# Altium PCB H3-core.PcbDoc (part 1 of 2)
Units mil, origin at the board's own origin, x right, y up, seen from the top; angles counter-clockwise.
Board outline 1574.8 x 1968.5 mil, 4 copper layers (Top Layer, GND, POWER, Bottom Layer), stack 23.756 mil thick; 157 components, 231 nets, 971 pads, 256 vias.
Unrouted connection lines stored in the file: 149.
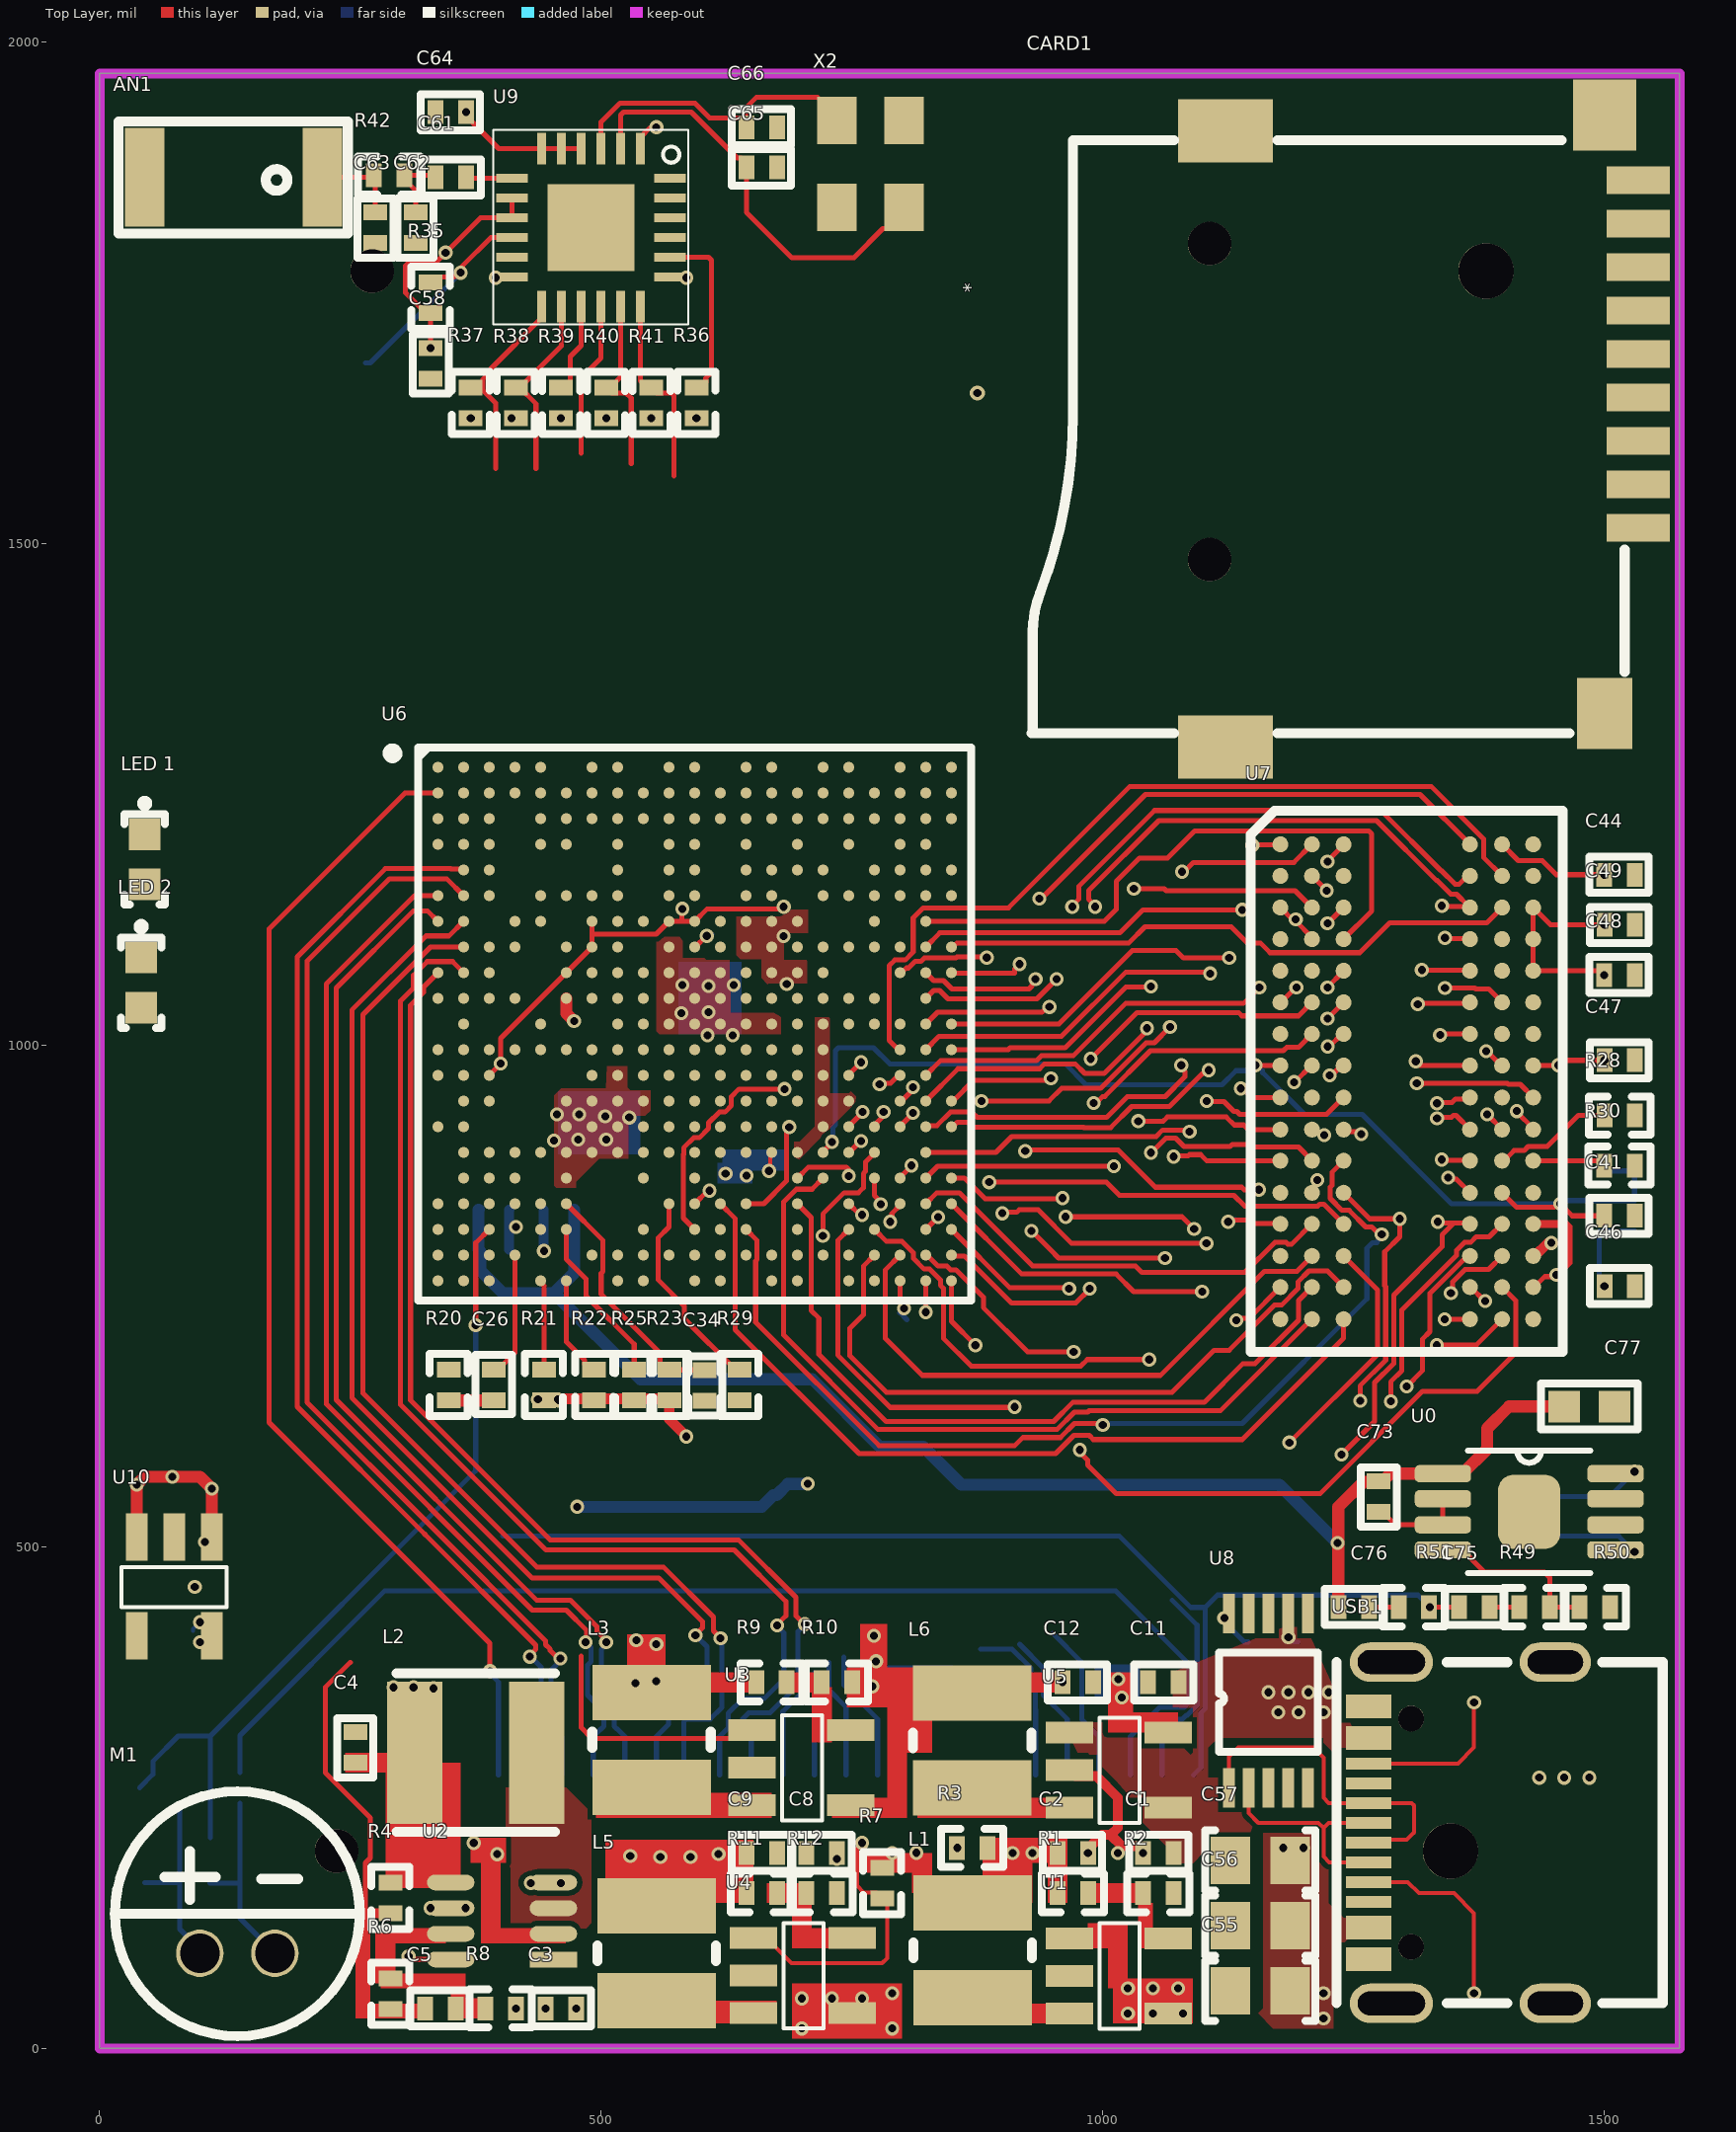
[diagram p0: Top Layer view]
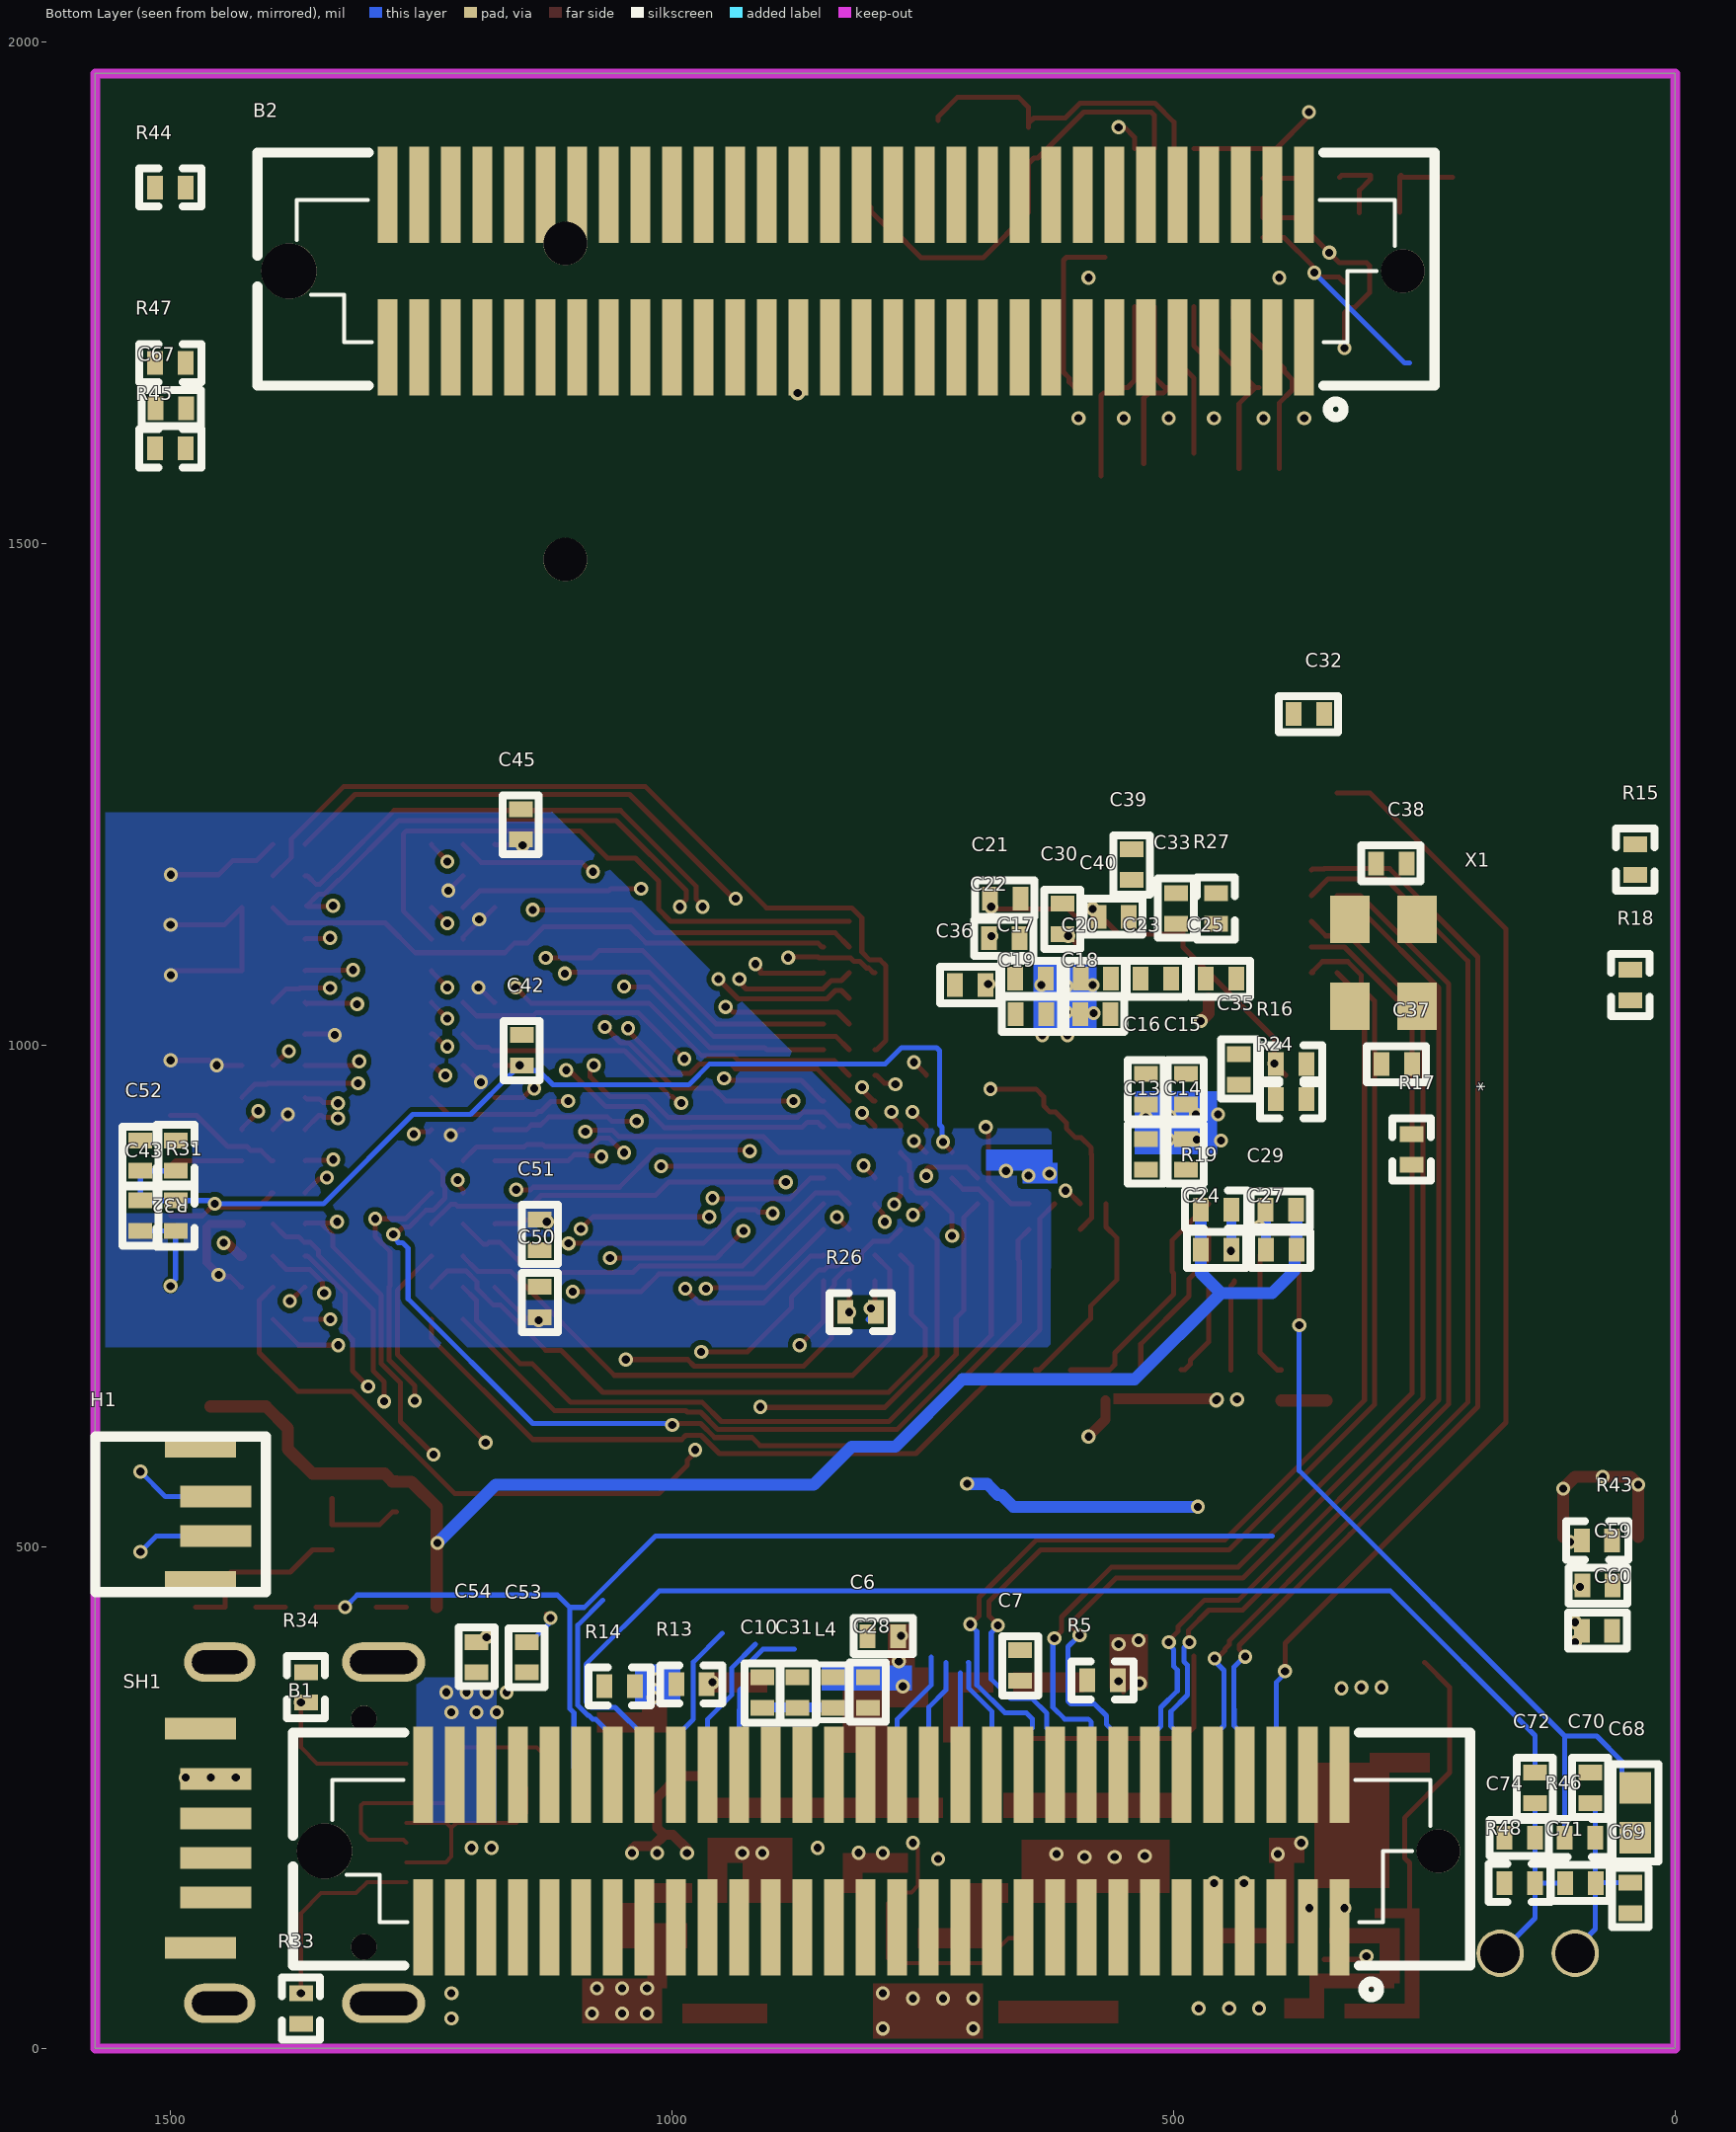
[diagram p1: Bottom Layer view, seen from below]
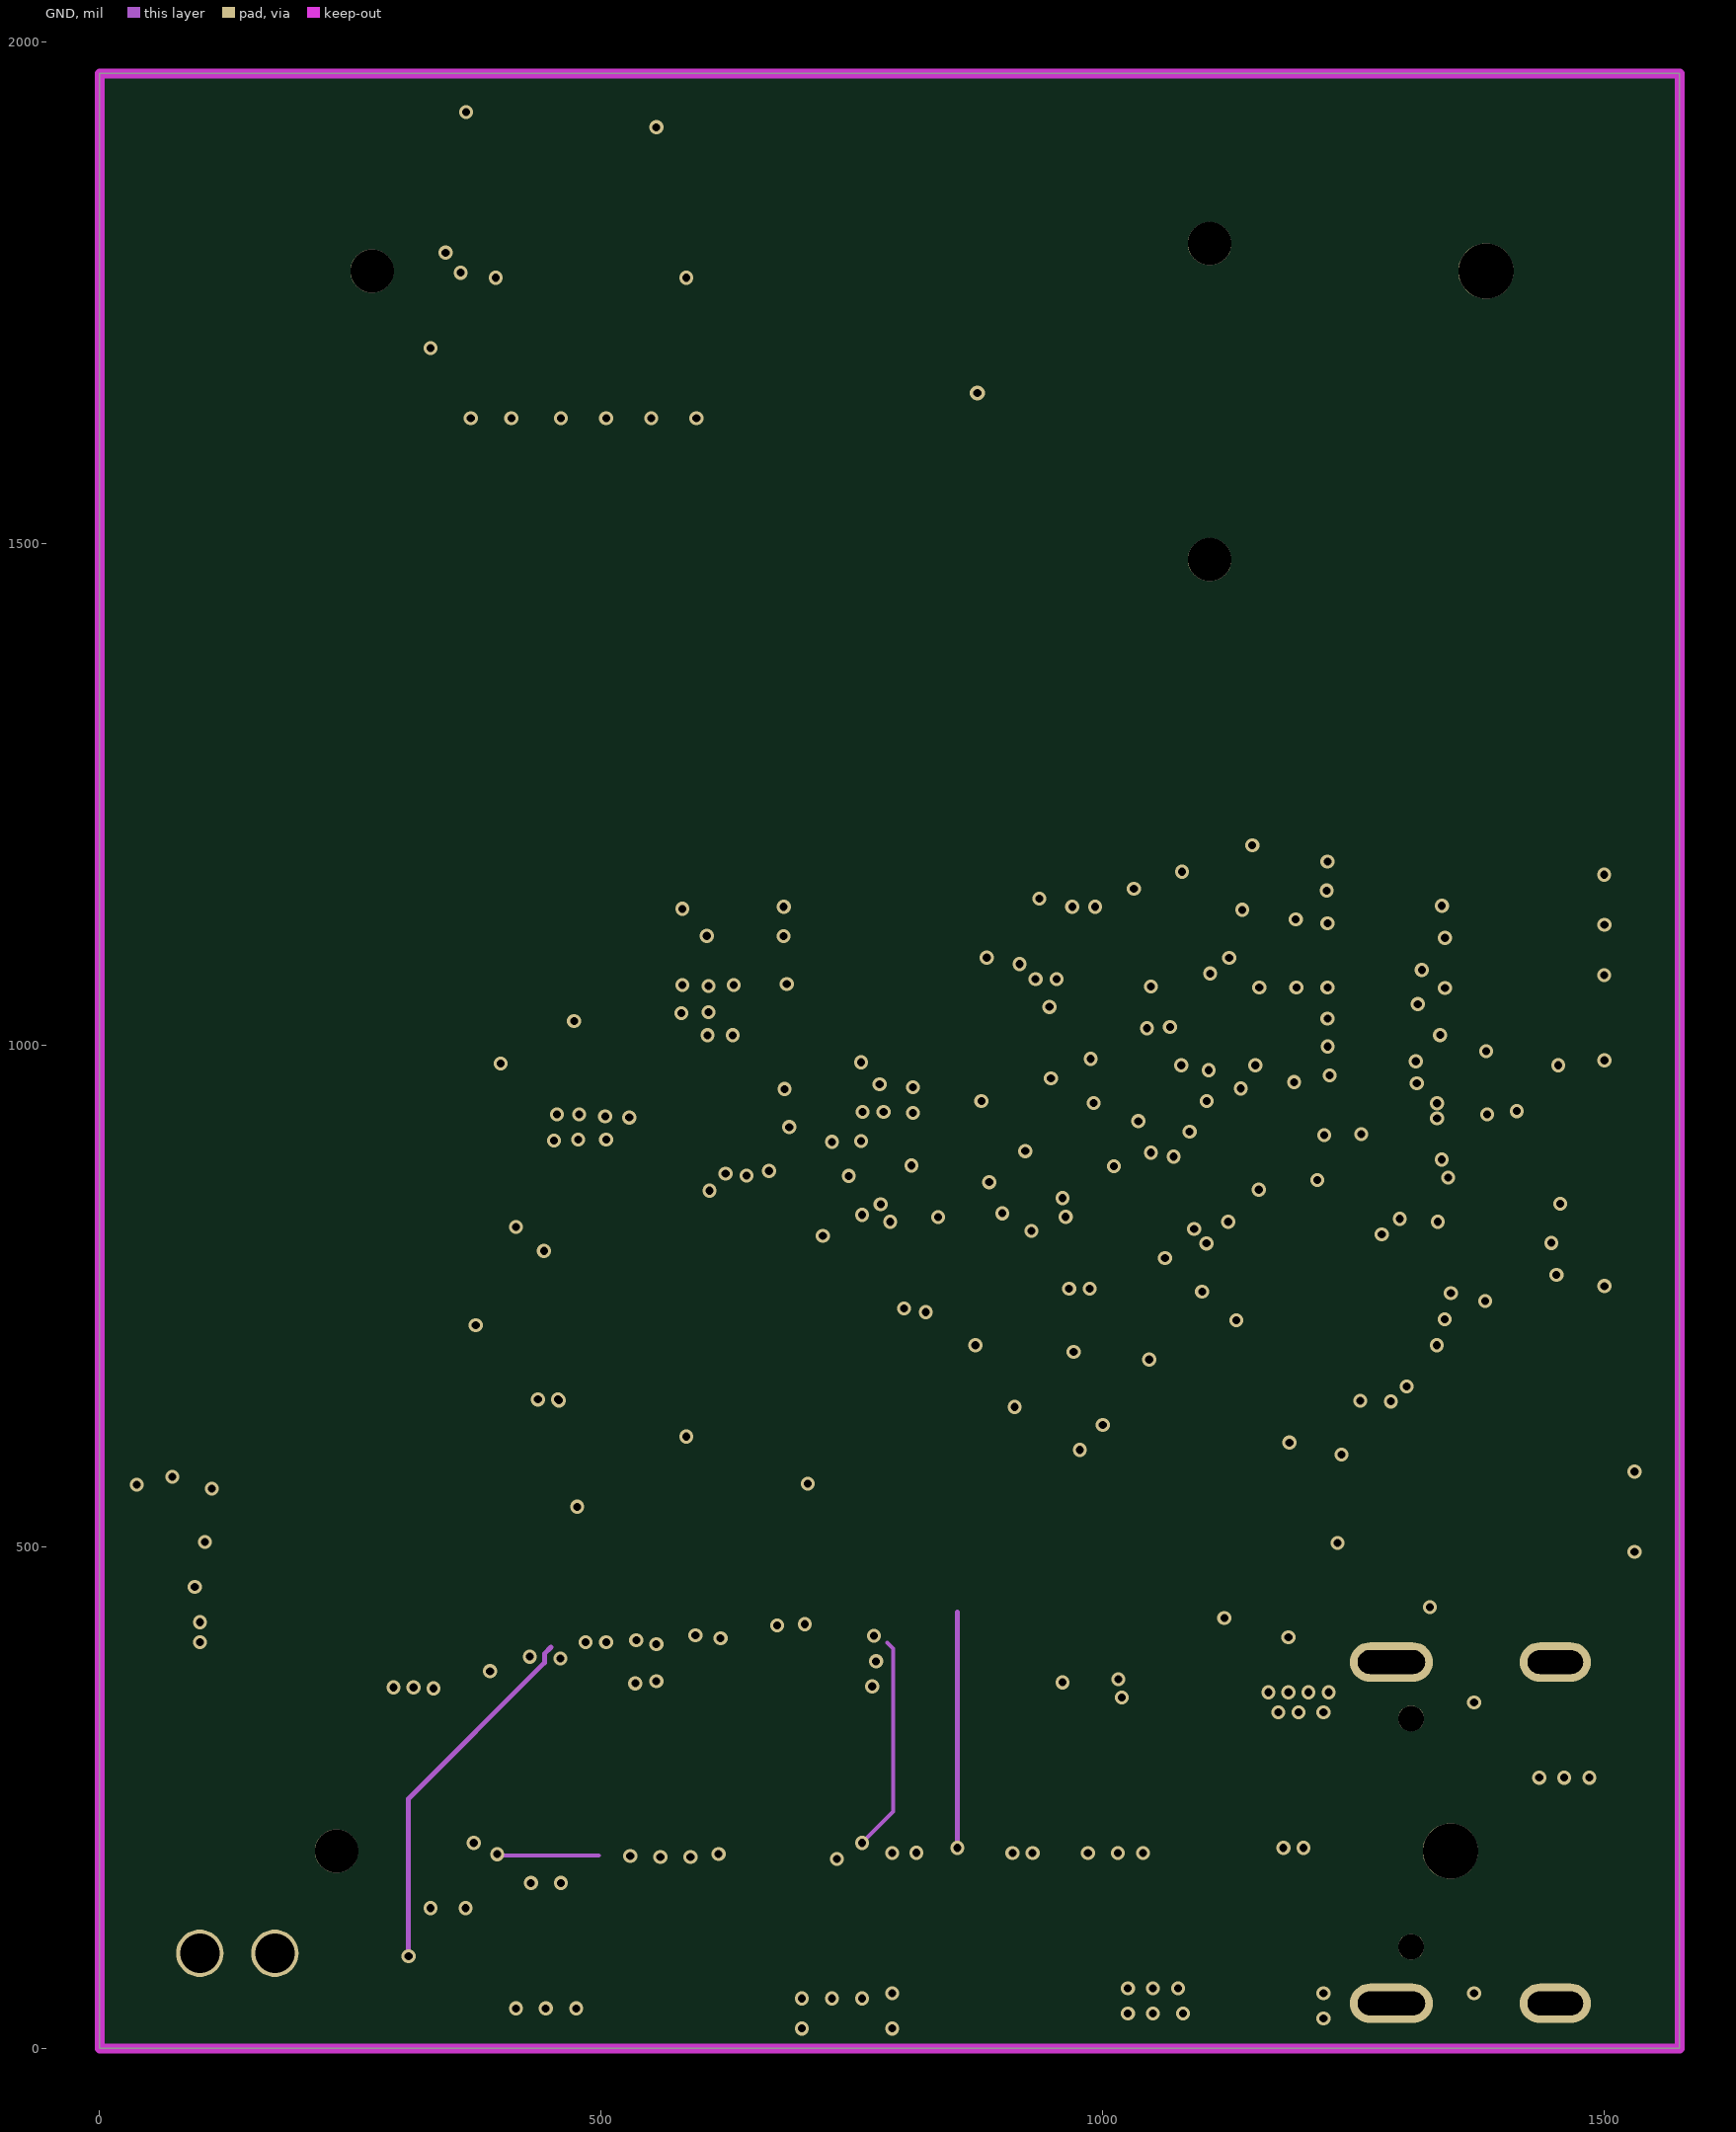
[diagram p2: GND]
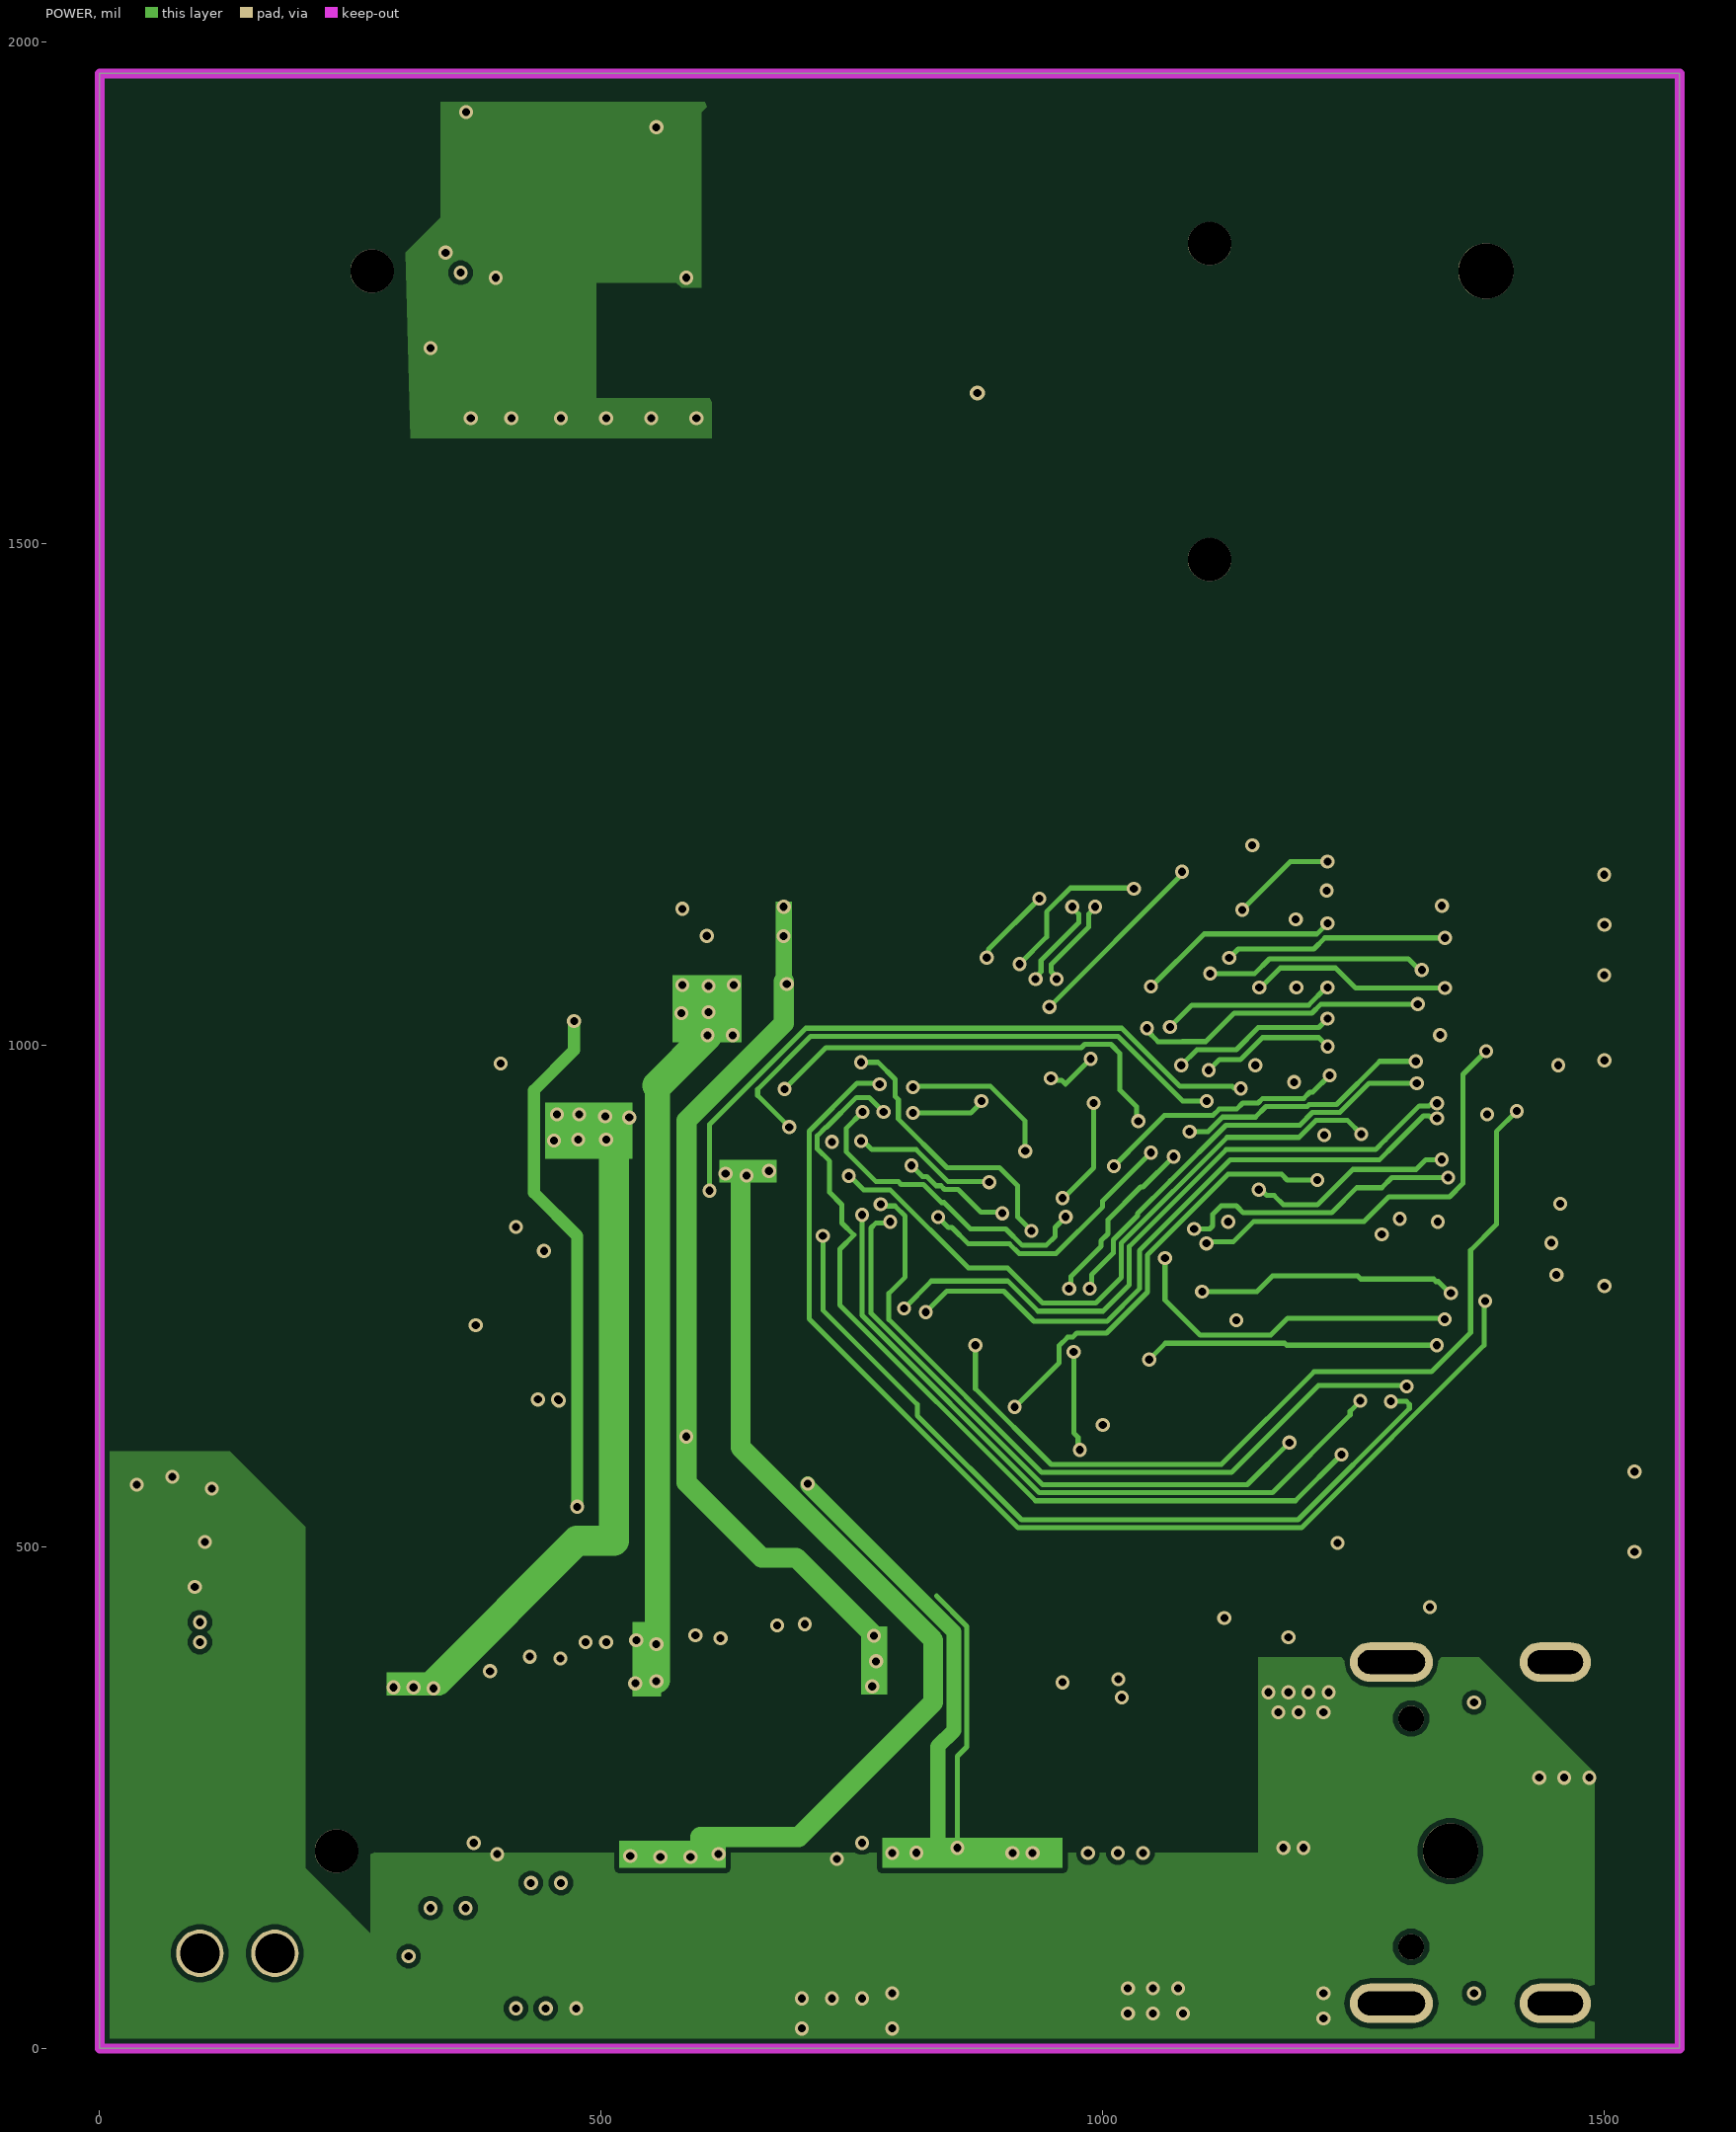
[diagram p3: POWER]

## Layer stack, top to bottom
Top Solder: solder mask 0.4, Solder Resist, Dk 3.5
Top Layer: signal copper 1.378
Dielectric 2: prepreg 2.8, PP-006, Dk 4.1
GND: signal copper 1.4
Dielectric 1: dielectric 12.6, FR-4, Dk 4.8
POWER: signal copper 1.4
Dielectric 3: prepreg 2.8, PP-006, Dk 4.1
Bottom Layer: signal copper 1.378
Bottom Solder: solder mask 0.4, Solder Resist, Dk 3.5

## Board outline
1575,0 0.2,0 0.2,1968.5 1575,1968.5

## Design rules (kind name [scope] priority, off if disabled: settings)
Clearance [All] p1: gap=5 ignorepadtopadclearanceinfootprint=FALSE except(0: Arc-Hole Track-Hole SMDPad-Hole THPad-Hole Via-Hole Fill-Hole Poly-Hole Region-Hole Text-Hole; 3: Arc-Arc Arc-Track Arc-SMDPad Arc-THPad Track-Track Track-SMDPad Track-THPad SMDPad-SMDPad SMDPad-THPad THPad-THPad)
DiffPairsRouting [All] p1: maxlimit=10 minlimit=5 mostfreqgap=5 toplayer_minwidth=5 toplayer_maxwidth=5 toplayer_prefwidth=5 midlayer1_minwidth=5 midlayer1_maxwidth=5 midlayer1_prefwidth=5 midlayer2_minwidth=5 midlayer2_maxwidth=5 midlayer2_prefwidth=5 bottomlayer_minwidth=5 bottomlayer_maxwidth=5 bottomlayer_prefwidth=5 maxuncoupledlength=500
HoleSize [All] p1: absolutevalues=TRUE maxlimit=1181.1 minlimit=1 maxpercent=80.000 minpercent=20.000
HoleToHoleClearance [All] p1: gap=6 allowstackedmicrovias=TRUE
MinimumSolderMaskSliver [All] p1: minsoldermaskwidth=1
PlaneConnect [All] p1: planeconnectstyle=Direct reliefexpansion=20 reliefentries=4 reliefconductorwidth=10 reliefairgap=10
PolygonConnect [All] p1: connectstyle=Direct reliefconductorwidth=10 reliefentries=4 polygonreliefangle="90 Angle" airgapwidth=10
RoomDefinition 4-Connect [InComponentClass('4-Connect')] p1: confinementstyle=ConfineIn formatcopy=TRUE lockcomponents=FALSE outline -5950,-4760 -3950,-4760 -3950,-3760 -5950,-3760
RoomDefinition 3-Wifi-SD [InComponentClass('3-Wifi-SD')] p2: confinementstyle=ConfineIn formatcopy=TRUE lockcomponents=FALSE outline -5950,-4760 -3950,-4760 -3950,-3760 -5950,-3760
RoomDefinition 2-core [InComponentClass('2-core')] p3: confinementstyle=ConfineIn formatcopy=TRUE lockcomponents=FALSE outline -5950,-4760 -3950,-4760 -3950,-3760 -5950,-3760
RoomDefinition 1-Power [InComponentClass('1-Power')] p4: confinementstyle=ConfineIn formatcopy=TRUE lockcomponents=FALSE outline -5950,-4760 -3950,-4760 -3950,-3760 -5950,-3760
RoutingVias [All] p1: holewidth=28 width=50 viastyle="Through Hole" minholewidth=11.81 minwidth=19.68 maxholewidth=1181.1 maxwidth=1181.1
SilkToSilkClearance [All] p1: silktosilkclearance=0
SilkToSolderMaskClearance [IsPad] p1: minsilkscreentomaskgap=0 clearancetoexposedcopper=TRUE
SolderMaskExpansion [All] p1: expansion=4 istentingtop=FALSE
Width [All] p1: maxlimit=39.37 minlimit=4 preferedwidth=4
23 further rules are at their usual default settings.

## Classes and differential pairs
component class 4-Connect: B1 B2 C53 C54 C55 C56 C57 R33 R34 SH1 U8 USB1
component class 3-Wifi-SD: AN1 C58 C59 C60 C61 C62 C63 C64 C65 C66 C67 C68 C69 C70 C71 C72 C73 C74 C75 C76 C77 CARD1 H1 M1 R35 R36 R37 R38 R39 R40 R41 R42 R43 R44 R45 R46 R47 R48 R49 R50 R51 U0 U9 U10 X2
component class 1-Power: C1 C2 C3 C4 C5 C6 C7 C8 C9 C10 C11 C12 L1 L2 L3 L4 L5 L6 R1 R2 R3 R4 R5 R6 R7 R8 R9 R10 R11 R12 R13 R14 U1 U2 U3 U4 U5
component class 2-core: C13 C14 C15 C16 C17 C18 C19 C20 C21 C22 C23 C24 C25 C26 C27 C28 C29 C30 C31 C32 C33 C34 C35 C36 C37 C38 C39 C40 C41 C42 C43 C44 C45 C46 C47 C48 C49 C50 C51 C52 "LED 1" "LED 2" R15 R16 R17 R18 R19 R20 R21 R22 R23 R24 R25 R26 R27 R28 R29 R30 R31 R32 U6 U7 X1
differential pair HTXC: +HTXC_P -HTXC_N
differential pair HTX2: +HTX2_P -HTX2_N
differential pair HTX1: +HTX1_P -HTX1_N
differential pair HTX0: +HTX0_P -HTX0_N
differential pair SDQS1: +SDQS1_P -SDQS1_N
differential pair SDQS0: +SDQS0_P -SDQS0_N
differential pair SCK: +SCK_P -SCK_N

## Components (designator, comment, footprint, x,y, rotation, side; value= is the part's Value field where it differs from the comment)
AN1 "AN9520-245" AN-5120 222.17,1865 r180 top
B1 "BTB0.8-60" BTB0.8-60-SMD 791.34,196.85 r0 bottom locked
B2 "BTB0.8-60" BTB0.8-60-SMD 826.77,1771.65 r0 bottom locked
C1 "10uF" CC1005-0402 1055.24,195 r0 top
C2 "10uF" CC1005-0402 970,195 r180 top
C3 "10uF" CC1005-0402 460,40 r0 top
C4 "10uF" CC1005-0402 255,300 r270 top
C5 "10uF" CC1005-0402 339.76,40 r180 top
C6 "10uF" CC1005-0402 790,411 r180 bottom
C7 "10uF" CC1005-0402 653,382 r270 bottom
C8 "10uF" CC1005-0402 719.76,195 r0 top
C9 "10uF" CC1005-0402 660,195 r180 top
C10 "10uF" CC1005-0402 910,355 r270 bottom
C11 "10uF" CC1005-0402 1060.24,365 r0 top
C12 "10uF" CC1005-0402 975,365 r180 top
C13 "10uF" CC1005-0402 527.95,891.19 r90 bottom
C14 "1uF" CC1005-0402 487.95,891.43 r90 bottom
C15 "100nF" CC1005-0402 487.95,956.19 r270 bottom
C16 "100nF" CC1005-0402 527.95,956.19 r270 bottom
C17 "10uF" CC1005-0402 642.95,1066.19 r180 bottom
C18 "1uF" CC1005-0402 578.19,1031.19 r0 bottom
C19 "100nF" CC1005-0402 642.48,1031.19 r180 bottom
C20 "100nF" CC1005-0402 577.71,1066.19 r0 bottom
C21 "1uF" CC1005-0402 667.95,1146.19 r0 bottom
C22 "100nF" CC1005-0402 669,1107 r0 bottom
C23 "1uF" CC1005-0402 517.95,1066.19 r180 bottom
C24 "4.7uF" CC1005-0402 457.95,796.19 r180 bottom
C25 "100nF" CC1005-0402 452.95,1066.19 r0 bottom
C26 "1uF" CC1005-0402 392.95,661.19 r90 top
C27 "100nF" CC1005-0402 392.95,796.19 r0 bottom
C28 "100nF" CC1005-0402 805,355 r90 bottom
C29 "10uF" CC1005-0402 393.19,836.19 r0 bottom
C30 "4.7uF" CC1005-0402 611,1126 r270 bottom
C31 "100nF" CC1005-0402 875,355 r270 bottom
C32 "100nF" CC1005-0402 365.24,1330 r0 bottom
C33 "100nF" CC1005-0402 497.95,1136.43 r90 bottom
C34 "100nF" CC1005-0402 602.95,660.95 r270 top
C35 "4.7uF" CC1005-0402 435,976 r90 bottom
C36 "100nF" CC1005-0402 703,1060 r0 bottom
C37 "18PF" CC1005-0402 277.71,981.19 r0 bottom
C38 "18PF" CC1005-0402 282.95,1181.19 r0 bottom
C39 "100nF" CC1005-0402 542,1180 r270 bottom
C40 "100nF" CC1005-0402 560,1128 r0 bottom
C41 "100nF" CC1005-0402 1515,830 r180 top
C42 "100nF" CC1005-0402 1150,995.24 r270 bottom
C43 "100nF" CC1005-0402 1530,830 r270 bottom
C44 "100nF" CC1005-0402 1515,1170 r180 top
C45 "100nF" CC1005-0402 1151,1220.24 r270 bottom
C46 "100nF" CC1005-0402 1515.24,760 r180 top
C47 "100nF" CC1005-0402 1515.24,985 r180 top
C48 "100nF" CC1005-0402 1515,1070 r180 top
C49 "100nF" CC1005-0402 1515.24,1120 r180 top
C50 "100nF" CC1005-0402 1132,744 r270 bottom
C51 "100nF" CC1005-0402 1132,811 r90 bottom
C52 "100nF" CC1005-0402 1530,890 r270 bottom
C53 "100nF" CC1005-0402 1145,390 r270 bottom
C54 "100nF" CC1005-0402 1195,390 r90 bottom
C55 "20uF" CC2012-0805 1156.97,57.36 r0 top
C56 "1uF" CC2012-0805 1156.97,122.36 r0 top
C57 "100NF" CC2012-0805 1156.97,187.36 r0 top
C58 "1UF" CC1005-0402 330,1679.76 r270 top
C59 "1UF" CC1005-0402 77.71,461.42 r180 bottom
C60 "1UF" CC1005-0402 78.19,416.42 r180 bottom
C61 "10pF" CC1005-0402 350,1865 r0 top
C62 "10pF" CC1005-0402 315,1814.76 r270 top
C63 "10pF" CC1005-0402 275,1815 r270 top
C64 "1UF" CC1005-0402 350.24,1930 r180 top
C65 "22PF" CC1005-0402 660,1875 r180 top
C66 "22PF" CC1005-0402 660,1915 r180 top
C67 "1UF" CC1005-0402 1499.76,1635 r180 bottom
C68 "10uF" CC1608-0603 40,235 r90 bottom
C69 "33pF" CC1005-0402 45,150 r90 bottom
C70 "100nf" CC1005-0402 85,259.76 r90 bottom
C71 "100pF" CC1005-0402 94.76,165 r0 bottom
C72 "100nf" CC1005-0402 140,260 r90 bottom
C73 "1uF" CC1005-0402 1275,550 r270 top
C74 "33pF" CC1005-0402 155.24,210 r0 bottom
C75 "330nF" CC1005-0402 1370.24,440 r0 top
C76 "100nf" CC1005-0402 1250,440 r0 top
C77 "10uF" CC1608-0603 1485,640 r0 top
CARD1 "TF-15×15" TF-SMD_TF-15-15 1328,1612 r180 top locked
H1 "SH1.0-2P" SH1.0-2P 1455,550 r270 bottom locked
L1 "2.2uH" Inductor-3010 870.24,97.76 r90 top
L2 "2.2uH" Inductor-4018 375,295 r180 top
L3 "2.2uH" Inductor-3010 550.24,307.76 r90 top
L4 "1500R" Inductor-0402 840,355 r90 bottom
L5 "2.2uH" Inductor-3010 555.24,95 r90 top
L6 "2.2uH" Inductor-3010 870,307.24 r90 top
"LED 1" "LED 0603" "LED 0603" 45,1185.24 r90 top
"LED 2" "LED 0603" "LED 0603" 41.5,1062.41 r90 top
M1 "MIC" MIC6*2.2mm 100,95 r0 top locked
R1 "10KR" CR1005-0402 970,155 r180 top
R2 "10KR" CR1005-0402 1055.24,155 r180 top
R3 "10KR" CR1005-0402 870,200 r0 top
R4 "0R" CR1005-0402 290,150 r90 top
R5 "2R" CR1005-0402 571,367 r0 bottom
R6 "10KR" CR1005-0402 290,54.76 r270 top
R7 "10KR" CR1005-0402 780,165 r90 top
R8 "10KR" CR1005-0402 399.76,40 r180 top
R9 "10KR" CR1005-0402 669.76,365 r180 top
R10 "10KR" CR1005-0402 735,365 r180 top
R11 "10KR" CR1005-0402 660,155 r180 top
R12 "10KR" CR1005-0402 719.76,155 r180 top
R13 "10KR" CR1005-0402 980.76,363 r180 bottom
R14 "10KR" CR1005-0402 1052.24,361 r180 bottom
R15 "2K" CR1005-0402 40,1185.24 r270 bottom
R16 "47K" CR1005-0402 382.95,981.19 r180 bottom
R17 "10K" CR1005-0402 262.95,896.19 r270 bottom
R18 "2K" CR1005-0402 45,1060.24 r270 bottom
R19 "220K" CR1005-0402 457.95,836.19 r0 bottom
R20 "0R" CR1005-0402 347.95,661.19 r90 top
R21 "100K" CR1005-0402 442.95,661.19 r90 top
R22 "47K" CR1005-0402 492.95,661.43 r90 top
R23 "1M" CR1005-0402 567.95,661.19 r90 top
R24 "10K" CR1005-0402 382.95,946.19 r180 bottom
R25 "47K" CR1005-0402 532.95,661.19 r90 top
R26 "100R" CR1005-0402 812,734 r0 bottom
R27 "6K 1%" CR1005-0402 457.95,1136.43 r270 bottom
R28 "240R 1%" CR1005-0402 1515.24,930 r0 top
R29 "240R 1%" CR1005-0402 637.95,661.19 r270 top
R30 "240R 1%" CR1005-0402 1515,880 r0 top
R31 "2K 1%" CR1005-0402 1495,830 r270 bottom
R32 "2K 1%" CR1005-0402 1495,890 r270 bottom
R33 "1.5K" CR1005-0402 1370,40 r90 bottom
R34 "1.5K" CR1005-0402 1365,360 r270 bottom
R35 "47K" CR1005-0402 330,1745 r270 top
R36 "47K" CR1005-0402 595,1640.47 r270 top
R37 "47K" CR1005-0402 370,1640.47 r270 top
R38 "47K" CR1005-0402 415,1640.24 r270 top
R39 "47K" CR1005-0402 460,1640.24 r270 top
R40 "47K" CR1005-0402 505,1640.24 r270 top
R41 "47K" CR1005-0402 550,1640.24 r270 top
R42 "2R" CR1005-0402 288.82,1867.05 r180 top
R43 "100kR" CR1005-0402 78.19,506.42 r0 bottom
R44 "47KR" CR1005-0402 1500,1855 r180 bottom
R45 "47KR" CR1005-0402 1500,1595 r180 bottom
R46 "2K" CR1005-0402 95.24,210 r0 bottom
R47 "33R" CR1005-0402 1500,1680 r180 bottom
R48 "2K" CR1005-0402 155.24,165 r180 bottom
R49 "20K" CR1005-0402 1430.24,440 r180 top
R50 "75K" CR1005-0402 1490.47,440 r180 top
R51 "22R" CR1005-0402 1310,440 r180 top
SH1 "SH1.0-4P" SH1.0-4P 1455,268.74 r270 bottom locked
U0 "LM4871" MSOP-8 1425,535 r0 top
U1 "RT8059" SOT23-5 966.81,34.8 r90 top
U2 "MP2143DJ" TSOT23-8 452.36,88.82 r180 top locked
U3 "SY8089A" SOT23-5 650.24,242.4 r90 top
U4 "RT8059" SOT23-5 651.81,35 r90 top
U5 "RT8059" SOT23-5 966.81,239.8 r90 top locked
U6 "ALLWINNER_H3" ALLWINNER-H3 597.32,1021.5 r0 top locked
U7 "K4B8G1646Q" FBGA96 1302.99,964 r270 top locked
U8 "CH340E" MSOP-10 1125.63,260 r90 top
U9 "RTL8189FTV" QFN24-0404-.5 490,1815 r180 top
U10 "RT9013-33GB" SOT23-5 36.85,509.85 r0 top
USB1 "Tpye-c 16P" "TYPE-C 16P" 1307.32,328.94 r90 top
X1 "24MHz" XTAL-3225 324.27,1038.81 r90 bottom
X2 "26MHz" XTAL-3225 735,1835 r90 top

## Footprints (in the part's own frame and the unit in brackets; to place one, negate y for a bottom-side part, rotate by r counter-clockwise, add the part's x,y. Pads: shape width x height; smd on the part's side, far side on the other; paste and mask are expansions set on the pad)
ALLWINNER-H3 [mil]
  round 11 smd: A1(-260,255.59) A2(-234.41,255.59) A3(-208.82,255.59) A4(-183.23,255.59) A5(-157.64,255.59) A7(-106.46,255.59) A8(-80.87,255.59) A10(-29.69,255.59) A11(-4.09,255.59) A13(47.09,255.59) A14(72.68,255.59) A16(123.86,255.59) A17(149.45,255.59) A19(200.63,255.59) A20(226.22,255.59) A21(251.81,255.59) AA1(-260,-256.22) AA2(-234.41,-256.22) AA3(-208.82,-256.22) AA5(-157.64,-256.22) AA6(-132.05,-256.22) AA8(-80.87,-256.22) AA9(-55.28,-256.22) AA11(-4.09,-256.22) AA12(21.5,-256.22) AA14(72.68,-256.22) AA15(98.27,-256.22) AA17(149.45,-256.22) AA18(175.04,-256.22) AA19(200.63,-256.22) AA20(226.22,-256.22) AA21(251.81,-256.22) B1(-260,230) B2(-234.41,230) B3(-208.82,230) B4(-183.23,230) B5(-157.64,230) B6(-132.05,230) B7(-106.46,230) B8(-80.87,230) B9(-55.28,230) B10(-29.69,230) B11(-4.09,230) B12(21.5,230) B13(47.09,230) B14(72.68,230) B15(98.27,230) B16(123.86,230) B17(149.45,230) B18(175.04,230) B19(200.63,230) B20(226.22,230) B21(251.81,230) C1(-260,204.41) C2(-234.41,204.41) C3(-208.82,204.41) C5(-157.64,204.41) C6(-132.05,204.41) C7(-106.46,204.41) C8(-80.87,204.41) C9(-55.28,204.41) C10(-29.69,204.41) C11(-4.09,204.41) C12(21.5,204.41) C13(47.09,204.41) C14(72.68,204.41) C15(98.27,204.41) C16(123.86,204.41) C17(149.45,204.41) C18(175.04,204.41) C19(200.63,204.41) C20(226.22,204.41) C21(251.81,204.41) D1(-260,178.82) D2(-234.41,178.82) D3(-208.82,178.82) D5(-157.64,178.82) D6(-132.05,178.82) D8(-80.87,178.82) D10(-29.69,178.82) D11(-4.09,178.82) D13(47.09,178.82) D15(98.27,178.82) D17(149.45,178.82) D19(200.63,178.82) D20(226.22,178.82) E2(-234.41,153.23) E3(-208.82,153.23) E8(-80.87,153.23) E10(-29.69,153.23) E11(-4.09,153.23) E13(47.09,153.23) E14(72.68,153.23) E15(98.27,153.23) E16(123.86,153.23) E18(175.04,153.23) E19(200.63,153.23) E20(226.22,153.23) E21(251.81,153.23) F1(-260,127.64) F2(-234.41,127.64) F3(-208.82,127.64) F5(-157.64,127.64) F6(-132.05,127.64) F7(-106.46,127.64) F8(-80.87,127.64) F10(-29.69,127.64) F11(-4.09,127.64) F13(47.09,127.64) F14(72.68,127.64) F16(123.86,127.64) F17(149.45,127.64) F18(175.04,127.64) F19(200.63,127.64) F20(226.22,127.64) F21(251.81,127.64) G1(-260,102.05) G2(-234.41,102.05) G4(-183.23,102.05) G5(-157.64,102.05) G7(-106.46,102.05) G8(-80.87,102.05) G9(-55.28,102.05) G10(-29.69,102.05) G11(-4.09,102.05) G12(21.5,102.05) G13(47.09,102.05) G14(72.68,102.05) G15(98.27,102.05) G18(175.04,102.05) G20(226.22,102.05) H2(-234.41,76.46) H3(-208.82,76.46) H4(-183.23,76.46) H6(-132.05,76.46) H7(-106.46,76.46) H8(-80.87,76.46) H10(-29.69,76.46) H11(-4.09,76.46) H12(21.5,76.46) H13(47.09,76.46) H14(72.68,76.46) H15(98.27,76.46) H16(123.86,76.46) H17(149.45,76.46) H18(175.04,76.46) H19(200.63,76.46) H20(226.22,76.46) H21(251.81,76.46) J1(-260,50.87) J2(-234.41,50.87) J3(-208.82,50.87) J6(-132.05,50.87) J7(-106.46,50.87) J8(-80.87,50.87) J9(-55.28,50.87) J10(-29.69,50.87) J11(-4.09,50.87) J12(21.5,50.87) J13(47.09,50.87) J14(72.68,50.87) J15(98.27,50.87) J16(123.86,50.87) J19(200.63,50.87) J20(226.22,50.87) J21(251.81,50.87) K1(-260,25.28) K2(-234.41,25.28) K3(-208.82,25.28) K4(-183.23,25.28) K6(-132.05,25.28) K7(-106.46,25.28) K8(-80.87,25.28) K9(-55.28,25.28) K10(-29.69,25.28) K11(-4.09,25.28) K12(21.5,25.28) K13(47.09,25.28) K14(72.68,25.28) K15(98.27,25.28) K16(123.86,25.28) K17(149.45,25.28) K18(175.04,25.28) K20(226.22,25.28) L2(-234.41,-0.31) L5(-157.64,-0.31) L8(-80.87,-0.31) L9(-55.28,-0.31) L10(-29.69,-0.31) L11(-4.09,-0.31) L12(21.5,-0.31) L13(47.09,-0.31) L14(72.68,-0.31) L15(98.27,-0.31) L16(123.86,-0.31) L17(149.45,-0.31) L18(175.04,-0.31) L19(200.63,-0.31) L20(226.22,-0.31) L21(251.81,-0.31) M1(-260,-25.91) M2(-234.41,-25.91) M3(-208.82,-25.91) M4(-183.23,-25.91) M5(-157.64,-25.91) M6(-132.05,-25.91) M7(-106.46,-25.91) M8(-80.87,-25.91) M9(-55.28,-25.91) M10(-29.69,-25.91) M11(-4.09,-25.91) M12(21.5,-25.91) M13(47.09,-25.91) M14(72.68,-25.91) M15(98.27,-25.91) M16(123.86,-25.91) M19(200.63,-25.91) M20(226.22,-25.91) M21(251.81,-25.91) N1(-260,-51.5) N2(-234.41,-51.5) N3(-208.82,-51.5) N7(-106.46,-51.5) N8(-80.87,-51.5) N9(-55.28,-51.5) N10(-29.69,-51.5) N11(-4.09,-51.5) N12(21.5,-51.5) N13(47.09,-51.5) N14(72.68,-51.5) N15(98.27,-51.5) N16(123.86,-51.5) N17(149.45,-51.5) N19(200.63,-51.5) N20(226.22,-51.5) P2(-234.41,-77.09) P3(-208.82,-77.09) P6(-132.05,-77.09) P7(-106.46,-77.09) P8(-80.87,-77.09) P9(-55.28,-77.09) P10(-29.69,-77.09) P11(-4.09,-77.09) P12(21.5,-77.09) P13(47.09,-77.09) P14(72.68,-77.09) P15(98.27,-77.09) P16(123.86,-77.09) P17(149.45,-77.09) P19(200.63,-77.09) P20(226.22,-77.09) P21(251.81,-77.09) R1(-260,-102.68) R2(-234.41,-102.68) R6(-132.05,-102.68) R7(-106.46,-102.68) R8(-80.87,-102.68) R9(-55.28,-102.68) R10(-29.69,-102.68) R11(-4.09,-102.68) R12(21.5,-102.68) R13(47.09,-102.68) R14(72.68,-102.68) R16(123.86,-102.68) R17(149.45,-102.68) R18(175.04,-102.68) R19(200.63,-102.68) R20(226.22,-102.68) R21(251.81,-102.68) T2(-234.41,-128.27) T3(-208.82,-128.27) T4(-183.23,-128.27) T5(-157.64,-128.27) T6(-132.05,-128.27) T7(-106.46,-128.27) T8(-80.87,-128.27) T9(-55.28,-128.27) T10(-29.69,-128.27) T11(-4.09,-128.27) T12(21.5,-128.27) T13(47.09,-128.27) T14(72.68,-128.27) T15(98.27,-128.27) T16(123.86,-128.27) T17(149.45,-128.27) T18(175.04,-128.27) T20(226.22,-128.27) U2(-234.41,-153.86) U3(-208.82,-153.86) U4(-183.23,-153.86) U6(-132.05,-153.86) U9(-55.28,-153.86) U11(-4.09,-153.86) U15(98.27,-153.86) U16(123.86,-153.86) U18(175.04,-153.86) U19(200.63,-153.86) U20(226.22,-153.86) U21(251.81,-153.86) V1(-260,-179.45) V2(-234.41,-179.45) V3(-208.82,-179.45) V4(-183.23,-179.45) V5(-157.64,-179.45) V6(-132.05,-179.45) V10(-29.69,-179.45) V11(-4.09,-179.45) V12(21.5,-179.45) V13(47.09,-179.45) V15(98.27,-179.45) V17(149.45,-179.45) V19(200.63,-179.45) V20(226.22,-179.45) V21(251.81,-179.45) W1(-260,-205.04) W2(-234.41,-205.04) W3(-208.82,-205.04) W5(-157.64,-205.04) W6(-132.05,-205.04) W9(-55.28,-205.04) W11(-4.09,-205.04) W12(21.5,-205.04) W13(47.09,-205.04) W15(98.27,-205.04) W17(149.45,-205.04) W18(175.04,-205.04) W20(226.22,-205.04) W21(251.81,-205.04) Y1(-260,-230.63) Y2(-234.41,-230.63) Y3(-208.82,-230.63) Y4(-183.23,-230.63) Y7(-106.46,-230.63) Y8(-80.87,-230.63) Y9(-55.28,-230.63) Y10(-29.69,-230.63) Y11(-4.09,-230.63) Y12(21.5,-230.63) Y13(47.09,-230.63) Y14(72.68,-230.63) Y15(98.27,-230.63) Y16(123.86,-230.63) Y17(149.45,-230.63) Y18(175.04,-230.63) Y19(200.63,-230.63) Y20(226.22,-230.63) Y21(251.81,-230.63)
  silkscreen extent -310,-276 272,275, body extent -280,-276 272,275, height 39
AN-5120 [mm]
  rect 1x2.5 smd: 1(0,0) 2(4.5,0)
  silkscreen extent -0.64,-1.42 5.16,1.42, body extent -0.32,-1.03 4.77,1.03, height 1.2
BTB0.8-60-SMD [mm] "板对板连接器贴片"
  rect 0.5x2.44 smd: 1(-11.6,1.93) 2(-10.8,1.93) 3(-10,1.93) 4(-9.2,1.93) 5(-8.4,1.93) 6(-7.6,1.93) 7(-6.8,1.93) 8(-6,1.93) 9(-5.2,1.93) 10(-4.4,1.93) 11(-3.6,1.93) 12(-2.8,1.93) 13(-2,1.93) 14(-1.2,1.93) 15(-0.4,1.93) 16(0.4,1.93) 17(1.2,1.93) 18(2,1.93) 19(2.8,1.93) 20(3.6,1.93) 21(4.4,1.93) 22(5.2,1.93) 23(6,1.93) 24(6.8,1.93) 25(7.6,1.93) 26(8.4,1.93) 27(9.2,1.93) 28(10,1.93) 29(10.8,1.93) 30(11.6,1.93) 31(11.6,-1.93) 32(10.8,-1.93) 33(10,-1.93) 34(9.2,-1.93) 35(8.4,-1.93) 36(7.6,-1.93) 37(6.8,-1.93) 38(6,-1.93) 39(5.2,-1.93) 40(4.4,-1.93) 41(3.6,-1.93) 42(2.8,-1.93) 43(2,-1.93) 44(1.2,-1.93) 45(0.4,-1.93) 46(-0.4,-1.93) 47(-1.2,-1.93) 48(-2,-1.93) 49(-2.8,-1.93) 50(-3.6,-1.93) 51(-4.4,-1.93) 52(-5.2,-1.93) 53(-6,-1.93) 54(-6.8,-1.93) 55(-7.6,-1.93) 56(-8.4,-1.93) 57(-9.2,-1.93) 58(-10,-1.93) 59(-10.8,-1.93) 60(-11.6,-1.93)
  round 1.1 hole 1.1 unplated: ""(-14.1,0)
  round 1.4 hole 1.4 unplated: ""(14.1,0)
  silkscreen extent -14.9,-3 14.9,3.7, body extent -14.88,-3 14.88,2.92, height 3
CC1005-0402 [mm]
  rect 0.4x0.6 smd: 1(-0.387,0) 2(0.387,0)
  silkscreen extent -0.74,-0.46 0.76,0.46, body extent -0.5,-0.25 0.5,0.25, height 0.3
CC1608-0603 [mm]
  rect 0.8x0.8 smd: 1(-0.635,0) 2(0.635,0)
  silkscreen extent -1.23,-0.58 1.23,0.58, body extent -0.8,-0.4 0.8,0.4, height 0.3
CC2012-0805 [mm]
  rect 1x1.2 smd: 1(-0.762,0) 2(0.762,0)
  silkscreen extent -1.4,-0.76 1.4,0.76, body extent -1,-0.62 1,0.63, height 0.5
CR1005-0402 [mm]
  rect 0.4x0.6 smd: 1(-0.387,0) 2(0.387,0)
  silkscreen extent -0.79,-0.48 0.79,0.48, body extent -0.5,-0.25 0.5,0.25, height 0.35
FBGA96 [mil] "FBGA96(HYNIX_SAMSUNG_512MX16_DDR3)"
  rrect100% 16x16 smd: A1(-236.22,-125.98) A2(-236.22,-94.49) A3(-236.22,-62.99) A7(-236.22,63) A8(-236.22,95) A9(-236.22,126) B1(-204.72,-125.98) B2(-204.72,-94.49) B3(-204.72,-62.99) B7(-204.72,63) B8(-204.72,95) B9(-204.72,126) C1(-173.23,-125.98) C2(-173.23,-94.49) C3(-173.23,-62.99) C7(-173.23,63) C8(-173.23,95) C9(-173.23,126) D1(-141.73,-125.98) D2(-141.73,-94.49) D3(-141.73,-62.99) D7(-141.73,63) D8(-141.73,95) D9(-141.73,126) E1(-110.24,-125.98) E2(-110.24,-94.49) E3(-110.24,-62.99) E7(-110.24,63) E8(-110.24,95) E9(-110.24,126) F1(-78.74,-125.98) F2(-78.74,-94.49) F3(-78.74,-62.99) F7(-78.74,63) F8(-78.74,95) F9(-78.74,126) G1(-47.24,-125.98) G2(-47.24,-94.49) G3(-47.24,-62.99) G7(-47.24,63) G8(-47.24,95) G9(-47.24,126) H1(-15.75,-125.98) H2(-15.75,-94.49) H3(-15.75,-62.99) H7(-15.75,63) H8(-15.75,95) H9(-15.75,126) J1(16,-125.98) J2(16,-94.49) J3(16,-62.99) J7(16,63) J8(16,95) J9(16,126) K1(48,-125.98) K2(48,-94.49) K3(48,-62.99) K7(48,63) K8(48,95) K9(48,126) L1(79,-125.98) L2(79,-94.49) L3(79,-62.99) L7(79,63) L8(79,95) L9(79,126) M1(111,-125.98) M2(111,-94.49) M3(111,-62.99) M7(111,63) M8(111,95) M9(111,126) N1(142,-125.98) N2(142,-94.49) N3(142,-62.99) N7(142,63) N8(142,95) N9(142,126) P1(174,-125.98) P2(174,-94.49) P3(174,-62.99) P7(174,63) P8(174,95) P9(174,126) R1(205,-125.98) R2(205,-94.49) R3(205,-62.99) R7(205,63) R8(205,95) R9(205,126) T1(237,-125.98) T2(237,-94.49) T3(237,-62.99) T7(237,63) T8(237,95) T9(237,126)
  silkscreen extent -270,-156 270,156, body extent -265,-151 264,150, height 39
Inductor-0402 [mm]
  rect 0.4x0.6 smd: 1(-0.387,0) 2(0.387,0)
  silkscreen extent -0.71,-0.39 0.71,0.39, body extent -0.5,-0.25 0.5,0.25, height 0.25
Inductor-3010 [mm] "贴片绕线电感"
  rect 1.4x3 smd: 1(-1.2,0) 2(1.2,0)
  silkscreen extent -0.2,-1.5 0.2,1.5, body extent -1.37,-1.52 1.57,1.5, height 1
Inductor-4018 [mil] "贴片绕线电感"
  rect 55.12x141.73 smd: 1(-61,0) 2(61,0)
  silkscreen extent -79,-79 79,79, body extent -63,-71 68,71, height 59
"LED 0603" [mm]
  rect 0.8x0.8 smd: 1(-0.635,0) 2(0.635,0)
  silkscreen extent -1.14,-0.51 1.48,0.51, body extent -0.8,-0.4 0.8,0.4, height 0.6
MIC6*2.2mm [mm] "麦克风"
  round 1.2 hole 1: 1(0,0) 2(1.9,0)
  silkscreen extent -2.16,-2.1 4.05,4.1, body extent -2.03,-1.99 3.97,4.01, height 2.3
MSOP-8 [mil]
  rrect50% 56x17 smd: 1(-86,38) 2(-86,13) 3(-86,-13) 4(-86,-38) 5(86,-38) 6(86,-13) 7(86,13) 8(86,38)
  rrect50% 62x74 smd: 9(0,0)
  silkscreen extent -61,-61 61,61, body extent -97,-61 97,61, height 45
MSOP-10 [mm]
  rect 1x0.3 smd: 1(0,0) 2(0,-0.5) 3(0,-1) 4(0,-1.5) 5(0,-2) 6(4.403,-2) 7(4.403,-1.5) 8(4.403,-1) 9(4.403,-0.5) 10(4.403,0)
  silkscreen extent 0.9,-2.25 3.42,0.25, body extent -0.32,-2.5 4.71,0.5, height 1.05
QFN24-0404-.5 [mm]
  rect 0.23x0.8 smd: 1(-1.25,-2) 2(-0.75,-2) 3(-0.25,-2) 4(0.25,-2) 5(0.75,-2) 6(1.25,-2) 13(1.25,2) 14(0.75,2) 15(0.25,2) 16(-0.25,2) 17(-0.75,2) 18(-1.25,2)
  rect 0.8x0.23 smd: 7(2,-1.25) 8(2,-0.75) 9(2,-0.25) 10(2,0.25) 11(2,0.75) 12(2,1.25) 19(-2,1.25) 20(-2,0.75) 21(-2,0.25) 22(-2,-0.25) 23(-2,-0.75) 24(-2,-1.25)
  rect 2.2x2.2 smd: 25(0,0)
  silkscreen extent -2.46,-2.47 2.47,2.45, body extent -2,-2 2,2, height 0.8
SH1.0-2P [mm]
  rect 0.55x1.8 smd: 0(-1.27,-0.381) 0(2.159,-0.381) 1(0,0) 2(1,0)
  silkscreen extent -1.52,-3.05 2.41,1.27, body extent -1.52,-3.17 2.41,0, height 3
SH1.0-4P [mm]
  rect 0.55x1.8 smd: 0(-1.27,-0.381) 0(4.27,-0.381) 1(0,0) 2(1,0) 3(2,0) 4(3,0)
  body extent -1.49,-2.34 4.43,0.55, height 3
SOT23-5 [mm] "适用于MIC5205"
  rect 0.55x1.2 smd: 1(1.905,0) 2(0.955,0) 3(0.005,0) 4(0.005,-2.5) 5(1.905,-2.5)
  silkscreen extent -0.38,-1.78 2.29,-0.76, body extent -0.6,-2.82 2.5,0.38, height 1.45
TF-SMD_TF-15-15 [mm]
  rect 1.6x0.701 smd: 1(-5.226,2.45) 2(-5.226,1.35) 3(-5.226,0.25) 4(-5.226,-0.85) 5(-5.226,-1.95) 6(-5.226,-3.05) 7(-5.226,-4.15) 8(-5.226,-5.25) 9(-5.226,-6.35)
  rect 1.6x1.8 smd: 10(-4.373,-8)
  rect 2.4x1.6 smd: 11(5.227,-7.6) 12(5.227,8)
  rect 1.4x1.801 smd: 13(-4.373,7.151)
  round 1.1 hole 1.1 unplated: ""(5.626,3.25) ""(5.626,-4.75)
  silkscreen extent -4.88,-7.37 10.13,7.64, body extent -5.66,-7.8 9.54,8.3, height 1.86
TSOT23-8 [mm]
  rect 1.2x0.4 smd: 1(0,0)
  oval 1.2x0.4 smd: 2(0,-0.65) 3(0,-1.3) 4(0,-1.95) 5(2.6,-1.95) 6(2.6,-1.3) 7(2.6,-0.65) 8(2.6,0)
  body extent -0.13,-2.43 2.67,0.47, height 1
"TYPE-C 16P" [mm]
  oval 1x2.099 hole 0.6 slot 1.7 at 90 deg: 1(-7.21,0.5) 2(1.43,0.5)
  oval 1x1.799 hole 0.6 slot 1.4 at 90 deg: 3(-7.21,-3.65) 4(1.43,-3.65)
  rect 0.6x1.15 smd: A1B12(-6.09,1.075) A4B9(-5.29,1.075) B1A12(0.31,1.075) B4A9(-0.49,1.075)
  rect 0.3x1.15 smd: A5(-4.14,1.075) A6(-3.14,1.075) A7(-2.64,1.075) A8(-1.64,1.075) B5(-1.14,1.075) B6(-2.14,1.075) B7(-3.64,1.075) B8(-4.64,1.075)
  round 0.65 hole 0.65 unplated: ""(-5.78,0) ""(0,0)
  silkscreen extent -7.21,-6.37 1.43,1.89, body extent -7.31,-6 1.63,0.9, height 3.18
XTAL-3225 [mm]
  rect 1.2x1 smd: 1(0,-1.7) 2(0,0) 2(2.2,-1.7) 3(2.2,0)
  body extent -0.43,-2.15 2.77,0.35, height 0.61

## Part data
AN1: "2.4G全向天线 蓝牙天线 陶瓷贴片 WIFI内置"
B1 B2: "板对板连接器 总高度5mm"
C1 C2 C3 C4 C5 C6 C7 C8 C9 C10 C11 C12 C13 C14 C15 C16 C17 C18 C19 C20 C21 C22 C23 C24 C25 C26 C27 C28 C29 C30 C31 C32 C33 C34 C35 C36 C37 C38 C39 C40 C41 C42 C43 C44 C45 C46 C47 C48 C49 C50 C51 C52 C53 C54 C58 C59 C60 C61 C62 C63 C64 C65 C66 C67 C68 C69 C70 C71 C72 C73 C74 C75 C76 C77: library part "Chip capacitor", "贴片电容"
C55 C56 C57: library part "Cap Chip 0805", "0805封装的电容", Published=8-Jun-2000, Publisher="Altium Limited", Revision="July-2002: Re-released for DXP Platform."
CARD1: "TF卡卡座 https://item.szlcsc.com/112422.html", BOM_JLCPCB Part Class="Extended Part", BOM_Manufacturer=SOFNG, BOM_Manufacturer Part=TF-15×15, BOM_Supplier=LCSC, BOM_Supplier Part=C111196, spicePre=C, spiceSymbolName=TF-15×15
L1 L2 L3 L4 L5 L6: library part "Chip inductor", "贴片电感"
M1: "驻体麦克风"
R1 R2 R3 R4 R5 R6 R7 R8 R9 R10 R11 R12 R13 R14 R15 R16 R17 R18 R19 R20 R21 R22 R23 R24 R25 R26 R27 R28 R29 R30 R31 R32 R33 R34 R35 R36 R37 R38 R39 R40 R41 R42 R43 R44 R45 R46 R47 R48 R49 R50 R51: library part "Chip resistor", "贴片电阻"
SH1: "间距为1mm的端子"
U0: "单通道音频放大器"
U1 U4 U5: "LDO 1A RICHTEK(台湾立锜)"
U2: "DCDC 3A MPS公司（中文名称：芯源信息系统有限公司）"
U3: "DCDC 2A"
U6: library part H3, "全志 双核A9 SOC", Contributor=Think0, spicePre=U, spiceSymbolName=ALLWINNER_H3, subpart_no=1
U7: "DDR3 512M MYK0(FBGA-96_512MX16_DDR3-1600)"
U8: "usd转串口芯片 MSOP10封装"
U10: "LDO 2.2-5.2V IN 500Ma OUT SOT23-5"
USB1: "16P 封装的TYPE -c接口 4固定插脚 双向"
X1 X2: library part "XTAL 3225", "3225封装的晶振"
U9: Contributor=Pythoniot, spicePre=U, spiceSymbolName=RTL8189FTV

## Via types
v1: diameter 14, hole 8, Top Layer to Bottom Layer, 255 vias
v2: diameter 15, hole 8, Top Layer to Bottom Layer, 1 vias

## Nets (pads, with @x,y where several pads share a name; then routed paths per layer and width w, separated by ;. In a path a pad name is that pad's centre, name@x,y a point inside that pad or via, vN(x,y) a via of type N, cw(c..) or ccw(c..) an arc to the next point about the centre after c; other vN are vias at no path point)
AFCC_EN: B1.58 U6.B1 | length 1163.3
  Top Layer w5: U6.B1@337.32,1251.5 304.5,1251.5 169,1116 169,624 389,404 v1@389,375
  Bottom Layer w5: v1(389.23,376.12) 389.23,373.69 397.64,365.28 B1.58@397.64,272.83
AGND: C24.1 C26.1 C27.1 C29.1 C73.1 C76.1 C77.1 R19.2 R20.1 U0.1 U0.7 U6.U3 | length 1543.6
  Top Layer w12: R20.1@347.95,645.95 C26.1@392.95,645.95 ; C76.1@1234.76,440 1234.76,539.76 1260,565 1274.76,565 C73.1@1275,565.24 1278.94,565.24 1286.7,573 U0.1@1339,573 1358.5,573 1383,597.5 1383,618 1405,640 C77.1@1460,640
  Bottom Layer w12: C29.1@377.95,836.19 377.83,836.07 377.83,796.31 C27.1@377.71,796.19 379.59,794.32 379.59,775.41 402,753 453,753 ; R19.2@473.19,836.19 C24.1@473.19,796.19 473.19,773.19 453,753 ; v1(1234,504) 1176,562 859,562 821,600 777.5,600 710.5,667 539,667 453,753
AP-RESET#: C34.1 R23.2 U6.V6 | length 247.1
  Top Layer w5: U6.V6@465.27,842.05 501.86,805.46 501.86,774.64 500,772.78 500,752 558.64,693.36 558.64,681.8 564.01,676.43 R23.2@567.95,676.43 602.71,676.43 C34.1@602.95,676.19
AVCC: C10.2 C31.2 L4.1 U6.G9 U6.V3
CAM_D0: B2.14 U6.C9
CAM_D1: B2.19 U6.E10
CAM_D2: B2.18 U6.D10
CAM_D3: B2.12 U6.C8
CAM_D4: B2.22 U6.C11
CAM_D5: B2.23 U6.C12
CAM_D6: B2.13 U6.E8
CAM_D7: B2.20 U6.A11
CAM_HSYNC: B2.21 U6.B11
CAM_MCLK: B2.15 U6.A10
CAM_PCLK: B2.16 U6.B10
CAM_VSYNC: B2.17 U6.C10
  other v2: 875,1650
CPUX-VSET: U6.T4
CSI-PWR-EN: B2.39 U6.C14
CSI_EN: B2.1 U6.D2
DM_USB-: U8.2 USB1.A7 USB1.B7 | length 229.2
  Top Layer w4: U8.2@1145.31,260 1145.31,234.69 1155,225 1215,225 1220,220 ; USB1.B7@1265,185.63 1225.63,185.63 1220,191.26 1220,220 ; USB1.A7@1265,225 1225,225 1220,220
DP_USB+: U8.1 USB1.A6 USB1.B6 | length 343
  Top Layer w4: U8.1@1125.63,260 1125.63,290.63 1135,300 1210,300 1220,290 1220,250 1225.31,244.69 USB1.B6@1265,244.69 1307.97,244.69 1310.31,242.34 1310.31,215.31 1303.01,208.01 1267.69,208.01 USB1.A6@1265,205.31
eMMC-CLK: U6.A17
eMMC-CMD: U6.E16
eMMC-D0: U6.B18
eMMC-D1: U6.C17
eMMC-D2: U6.D17
eMMC-D3: U6.C18
eMMC-D4: U6.B17
eMMC-D5: U6.B19
eMMC-D6: U6.F17
eMMC-D7: U6.C19
eMMC-RST: U6.H16
EPHY-LINK-LED: B2.52 C32.2 U6.A2
EPHY-RXN: B2.48 U6.A4
EPHY-RXP: B2.49 U6.B4
EPHY-SPD-LED: B2.47 C33.2 U6.F7
EPHY-TXN: B2.51 U6.A3
EPHY-TXP: B2.50 U6.B3
GND: "LED 1.2" "LED 2.2" AN1.2 B1.1 B1.2 B1.3 B1.4 B1.5 B1.6 B1.7 B1.8 B1.9 B1.10 B1.11 B1.12 B1.13 B1.14 B1.15 B1.16 B1.17 B1.18 B1.19 B1.20 B1.21 B1.22 B1.23 B1.24 B1.25 B1.26 B1.27 B1.28 B1.29 B1.30 B1.34 B1.35 B2.60 C1.1 C2.1 C3.1 C4.1 C6.1 C7.1 C8.1 C9.1 C10.1 C11.1 C12.1 C13.1 C14.1 C15.1 C16.1 C17.1 C18.1 C19.1 C20.1 C21.1 C22.1 C23.1 C25.1 C28.1 C30.1 C31.1 C32.1 C33.1 C34.2 C35.1 C36.2 C37.1 C38.1 C39.1 C40.1 C41.1 C42.1 C44.1 C45.1 C46.1 C47.1 C48.1 C49.1 C50.1 C51.1 C52.1 C53.2 C54.1 C55.1 C56.1 C57.1 C58.2 C59.2 C60.2 C62.2 C63.2 C64.2 C65.1 C66.1 C67.2 C68.1 C69.1 C74.2 CARD1.6 CARD1.10 CARD1.11 CARD1.12 CARD1.13 R2.1 R8.1 R10.1 R12.1 R14.1 R20.2 R27.2 R28.2 R29.2 R30.2 R32.1 R33.1 R34.1 R43.1 R48.1 SH1.4 U1.2 U2.4 U2.6 U3.2 U4.2 U5.2 U6.A20 U6.A21 U6.AA1 U6.B20 U6.B21 U6.C21 U6.E18 U6.E19 U6.E20 U6.F19 U6.F20 U6.F21 U6.G8 U6.H8 U6.H12 U6.H15 U6.H17 U6.H18 U6.H19 U6.J9 U6.J13 U6.J16 U6.K7 U6.K8 U6.K9 U6.K13 U6.K14 U6.K15 U6.K16 U6.K17 U6.K18 U6.L8 U6.L9 U6.L15 U6.L17 U6.L18 U6.L19 U6.M5 U6.M7 U6.M8 U6.M9 U6.M10 U6.M11 U6.M12 U6.M13 U6.M14 U6.M15 U6.N7 U6.N9 U6.N10 U6.N11 U6.N12 U6.N13 U6.N14 U6.N15 U6.P10 U6.P11 U6.P12 U6.P13 U6.P14 U6.P15 U6.R9 U6.R10 U6.R11 U6.R12 U6.R13 U6.R14 U6.T9 U6.T11 U7.A9 U7.B1 U7.B3 U7.B9 U7.D1 U7.D8 U7.E1 U7.E2 U7.E8 U7.F9 U7.G1 U7.G8 U7.G9 U7.J2 U7.J8 U7.M1 U7.M9 U7.P1 U7.P9 U7.T1 U7.T9 U8.3 U9.22 U9.23 U9.24 U9.25 U10.2 USB1.A1B12 USB1.B1A12 X1.2 X2.2 | length 197.2
  Top Layer w10: U5.2@966.81,277.4 972.64,271.57 993.43,271.57 1015,250 1015,220 1007.93,212.93 ; v1(985.24,195) 985.24,198.94 999.23,212.93 1007.93,212.93 ; v1(1040,195) 1040,198.94 1037.13,201.81 1019.05,201.81 1007.93,212.93 ; U7.P9@1428.99,790 1430.62,790 1443.62,803 v1(1447,803)
  other v1: 415,40 444.76,40 330,140 365,140 430,165 460,165 1015,195
GPIOA6: B2.29 U6.E14
GPIOA7: B2.24 U6.D8
GPIOA8: B2.30 U6.F13
GPIOA9: B2.28 U6.D13
GPIOA10: B2.25 U6.E11
GPIOA20: B2.43 U6.A13
GPIOA21: B2.42 U6.A14
GPIOE14: B1.60 U6.C6
GPIOE15: B1.59 U6.C5
GPIOL3/K1: B1.42 U6.R1
GPIOL4/RECOVERY: R16.2 R24.2 U6.N2
GPIOL8/PWR-STB: R3.1 U2.8 U3.1 U6.T2 | length 1162.2
  Top Layer w5: v1(308,92) 310.44,92 313.62,88.82 U2.8@350,88.82 ; 480,391.19 480,320 490.93,309.07 641.91,309.07 U3.1@650.24,317.4
  GND w5: v1(308,92) 308,249.13 443.43,384.56 443.43,393.43 450,400 ; v1(855,200) 855,435
  POWER w5: 834.19,451.19 864.5,420.88 864.5,300.72 855,291.22 v1(855,200)
GPIOL9/PWR-DRAM: R7.1 U4.1 U6.M6 | length 497.4
  Top Layer w4: U4.1@651.81,110 664.61,110 689.61,85 780,85 785,90 785,144.76 R7.1@780,149.76 774.13,155.64 761.71,155.64 755,162.34 755,200 v1(760,205)
  GND w4: v1(760,205) 791,236 791,398.71 785,404.71
GPIOL10/PWR-LED: R18.1 U6.V2
HCEC: B1.47 U6.G5 | length 119.2
  Bottom Layer w5: 727,385 727,357.39 744.09,340.3 B1.47@744.09,272.83
HHPD: B1.46 U6.M2 | length 131.1
  Bottom Layer w5: 742,390 742,362 775.59,328.41 B1.46@775.59,272.83
HSCL: B1.49 U6.H3 | length 122
  Bottom Layer w5: B1.49@681.1,272.83 681.1,335.97 704.6,359.47 704.6,384.6 704.93,384.93
HSDA: B1.48 U6.K3 | length 101.8
  Bottom Layer w5: B1.48@712.6,272.83 712.6,374.6
HTX0_N: B1.55 U6.F1 | length 1079.2
  Top Layer w5: U6.F1@337.32,1149.14 314,1149.14 226,1061.14 226,642.43 431.43,437 465.17,437 485.61,416.56 485.61,406.15 v1(484.45,404.99)
  Bottom Layer w5: v1(484.45,404.99) 484.57,404.99 490.06,399.51 490.06,385.78 486.5,382.23 486.5,352.33 502.87,335.96 502.87,321.29 499.94,318.37 499.47,318.37 492.13,311.02 B1.55@492.13,272.83
HTX0_P: B1.54 U6.G1 | length 1067.9
  Top Layer w5: U6.G1@337.32,1123.55 326.87,1134 313,1134 236,1057 236,646.57 435.57,447 469.32,447 495.61,420.71 495.61,416.12 504.97,406.76 v1(504.97,404.98)
  Bottom Layer w5: v1(504.97,404.98) 504.97,402.54 500.06,397.63 500.06,380.78 496.5,377.23 496.5,356.47 512.87,340.1 512.87,321.29 515.8,318.37 516.28,318.37 523.62,311.02 B1.54@523.62,272.83
HTX1_N: B1.53 U6.G2 | length 1167.8
  Top Layer w5: U6.G2@362.91,1123.55 348.36,1109 325.44,1109 251.5,1035.06 251.5,648.65 431.15,469 557.51,469 601,425.51 601,419.43 594,412.43 v1(594,412)
  Bottom Layer w5: B1.53@555.12,272.83 555.12,311.02 567.22,323.12 567.22,331.65 578.93,343.37 602.49,343.37 605.5,346.37 605.5,400.5 596.94,409.06 v1@596.34,409.06
HTX1_P: B1.52 U6.H2 | length 1139.8
  Top Layer w5: U6.H2@362.91,1097.96 U6.H2@362.91,1097.96 330,1098 262.5,1030.5 262.5,653.21 435.71,480 562.06,480 612,430.06 612,416.43 619,409.43 v1(619,409)
  Bottom Layer w5: B1.52@586.61,272.83 582.22,277.23 582.22,325.44 585.14,328.37 608.7,328.37 620.5,340.16 620.5,407.5 v1(619,409)
HTX2_N: B1.51 U6.J2 | length 1177.7
  Top Layer w5: U6.J2@362.91,1072.37 361.63,1072.37 361.63,1073.65 351.91,1083.37 326.68,1083.37 313,1069.69 313,1057 300,1044 300,642 444.93,497.07 632.72,497.07 684.15,445.64 684.15,431.28 675.3,422.43 v1(675.3,421.86)
  Bottom Layer w5: B1.51@618.11,272.83 618.11,311.02 626.75,319.66 626.75,334.34 641.18,348.78 662.48,348.78 682.04,368.34 682.04,414.43 675.3,421.17 v1(675.3,421.86)
HTX2_P: B1.50 U6.J1 | length 1125.7
  Top Layer w5: U6.J1@337.32,1072.37 323,1058.05 323,1052.86 310,1039.86 310,646.14 449.07,507.07 636.86,507.07 694.15,449.78 694.15,431.28 702.43,423 v1(703,423)
  Bottom Layer w5: B1.50@649.61,272.83 649.61,311.02 640.97,319.66 640.97,328.45 647.08,334.55 668.37,334.55 696.26,362.45 696.26,415.57 703,422.31 v1(703,423)
HTXC_N: B1.57 U6.E2 | length 1128.6
  Top Layer w5: U6.E2@362.91,1174.73 361.76,1175.88 350.31,1175.88 350.19,1176 284.86,1176 197,1088.14 197,639.86 324.3,512.56 434.72,402.13 434.72,397.99 428.93,392.2 v1(428.93,390.56)
  Bottom Layer w5: v1(428.93,390.56) 429.79,390.56 440,380.35 440,338.04 439.88,337.92 439.88,321.77 429.13,311.02 B1.57@429.13,272.83
HTXC_P: B1.56 U6.F2 | length 1122.1
  Top Layer w5: U6.F2@362.91,1149.14 346.05,1166 289,1166 207,1084 207,644 328.44,522.56 444.72,406.28 444.72,402.66 449.09,398.29 449.09,396.77 457.11,388.75 v1(459.25,388.75)
  Bottom Layer w5: v1(459.25,388.75) 459.25,386.31 450,377.06 450,333.9 449.88,333.78 449.88,321.77 460.63,311.02 B1.56@460.63,272.83
I2C0_SCL: B2.26 U6.F11
I2C0_SDA: B2.27 U6.C13
I2C1_SCL: B2.41 U6.B13
I2C1_SDA: B2.40 U6.B14
I2C2_SCL: B2.45 U6.B12
I2C2_SDA: B2.46 U6.C7
IR-RX: R17.2 U6.U2
KEY-ADC: R21.2 U6.AA5 | length 90.2
  Top Layer w5: U6.AA5@439.68,765.28 439.68,763.66 442.95,760.39 R21.2@442.95,676.43
LINEOUTL: B1.36 C75.1 R51.1 U6.AA3 | length 1165
  Top Layer w5: R51.1@1325.24,440 v1(1326,440) C75.1@1355,440
  Bottom Layer w5: 402,511 1016.31,511 1087.63,439.69 1102,439.69 ; B1.36@1090.55,272.83 1097.89,280.18 1097.89,334.6 1102,338.7 1102,439.69 ; v1(1326,440) 1314,452 1114.31,452 1102,439.69
LINEOUTR: B1.37 U6.Y3 | length 201.3
  Bottom Layer w5: B1.37@1059.05,272.83 1059.05,311.02 1076.21,328.18 1079.25,328.18 1083.24,332.17 1084.15,332.17 1094,342.02 1094,422 1069,447
MBIAS: B1.40 C68.2 R46.2 U6.W3 | length 970.9
  Top Layer w5: v1(375,721) 375,802.96 U6.W3@388.5,816.46
  Bottom Layer w5: C68.2@40,260 53.25,273.25 53.25,286.25 78.47,311.47 110.47,311.47 ; R46.2@110.47,210 110.47,311.47 ; v1(375,721) 375,576 110.47,311.47 ; 917,403 940.78,379.22 940.78,352.22 964.57,328.43 B1.40@964.57,272.83
MICIN1N: B1.38 C72.2 U6.Y1 | length 1221.2
  Bottom Layer w5: C72.2@140,275.24 140,312 284,456 1012.99,456 1086,382.99 1086,345.33 1080.83,340.17 1056.7,340.17 1027.56,311.02 B1.38@1027.56,272.83
MICIN1P: B1.39 C70.2 U6.W2 | length 160.2
  Bottom Layer w5: 950,414 978.9,385.1 978.9,328.18 996.06,311.02 B1.39@996.06,272.83
NetAN1_1: AN1.1 C63.1 R42.2 | length 89.7
  Top Layer w5: AN1.1@222.17,1865 271.53,1865 R42.2@273.58,1867.05 275,1865.63 C63.1@275,1830.24
NetC5_1: C5.1 R6.1 R8.2 U2.7
NetC30_2: C30.2 U6.H11 | length 23.1
  Top Layer w5: U6.H11@593.23,1097.96 593.71,1097.96 604.8,1109.05 v1(605.28,1109.05)
  Bottom Layer w4: v1(605.28,1109.05) 609.29,1109.05 C30.2@611,1110.76
NetC53_1: C53.1 U8.10 | length 42.3
  Top Layer w4: v1(1121.14,429.14) 1121.42,429.14 U8.10@1125.63,433.35
  Bottom Layer w5: v1(1121.14,429.14) 1122.86,427.42 1122.86,423.44 1141.06,405.24 C53.1@1145,405.24
NetC61_1: C61.1 C62.1 R42.1 | length 73.1
  Top Layer w5: C62.1@315,1830 315,1852.17 304.05,1863.11 R42.1@304.05,1867.05 332.71,1867.05 C61.1@334.76,1865
NetC61_2: C61.2 U9.7 | length 46.4
  Top Layer w5: C61.2@365.24,1865 366.03,1864.21 U9.7@411.26,1864.21
NetC65_2: C65.2 U9.2 X2.1 | length 428.5
  Top Layer w5: U9.2@519.53,1893.74 519.53,1927.07 522.46,1930 589.76,1930 635.45,1884.31 639.39,1884.31 644.76,1878.94 644.76,1830.24 690,1785 751.93,1785 780.81,1813.88 784.74,1813.88 801.93,1831.06 X2.1@801.93,1835
NetC66_2: C66.2 U9.3 X2.3 | length 313.7
  Top Layer w5: U9.3@499.84,1893.74 499.84,1920.11 518.73,1939 593.49,1939 608.18,1924.31 639.39,1924.31 C66.2@644.76,1918.94 ; C66.2@644.76,1915 C66.2@644.76,1918.94 ; X2.3@735,1921.61 735,1925.55 715.55,1945 655,1945 644.76,1934.76 C66.2@644.76,1918.94
NetC69_2: C69.2 C70.1 C71.1 M1.1 R46.1 | length 195
  Bottom Layer w5: C69.2@45,165.24 79.76,165.24 C71.1@80,165 ; C70.1@85,244.53 80,239.53 R46.1@80,210 C71.1@80,165 ; M1.1@100,95 100,99.01 80,119.01 C71.1@80,165
NetC71_2: C71.2 C72.1 C74.1 M1.2 R48.2 | length 194.2
  Bottom Layer w5: C71.2@110,165 R48.2@140,165 ; C72.1@140,244.76 C74.1@140,210 R48.2@140,165 ; M1.2@174.8,95 140,129.8 R48.2@140,165
NetC73_2: C73.2 U0.2 U0.3 | length 95.3
  Top Layer w5: C73.2@1275,534.76 1278.94,534.76 1291.7,522 U0.3@1339,522 U0.2@1339,548
NetC75_2: C75.2 R49.2 | length 29.5
  Top Layer w5: C75.2@1385.47,440 R49.2@1415,440
NetC76_2: C76.2 R51.2 | length 29.5
  Top Layer w5: C76.2@1265.24,440 R51.2@1294.76,440
NetCARD1_5: CARD1.5 R47.1
NetH1_1: H1.1 U0.8 | length 85.4
  Bottom Layer w5: H1.1@1455,550 1505,550 v1(1530,575)
NetH1_2: H1.2 R50.1 U0.5 | length 81.5
  Bottom Layer w5: H1.2@1455,510.63 1514.37,510.63 v1(1530,495)
NetL1_1: L1.1 U1.3
NetL2_1: L2.1 U2.3
NetL3_1: L3.1 U3.3
NetL5_1: L5.1 U4.3
NetL6_1: L6.1 U5.3
"NetLED 1_1": "LED 1.1" R15.2
"NetLED 2_1": "LED 2.1" R18.2
NetR1_1: R1.1 R2.2 U1.5
NetR9_1: R9.1 R10.2 U3.5
NetR11_1: R11.1 R12.2 U4.5
NetR13_1: R13.1 R14.2 U5.5 | length 1.5
  Top Layer w4: v1@1017.5,350 v1(1019,350)
  other v1: 1015.53,368
NetR27_1: R27.1 U6.F6
NetR28_1: R28.1 U7.L8 | length 120.6
  Top Layer w5: U7.L8@1397.99,885 1399.91,885 1409.91,895 1419.9,895 1423.9,899 1443,899 1474,930 R28.1@1500,930
NetR29_1: R29.1 U6.V10 | length 206.2
  Top Layer w5: U6.V10@567.63,842.05 567.63,818.87 556.63,807.87 556.63,766.37 583,740 583,727.44 634.01,676.43 R29.1@637.95,676.43
NetR30_1: R30.1 U7.L9 | length 72.8
  Top Layer w5: U7.L9@1428.99,885 1494.76,885 R30.1@1499.76,880